# Altium PCB MainCyclomotion.PcbDoc
Units mm, origin at the board's own origin, x right, y up, seen from the top; angles counter-clockwise.
Board outline 88.21 x 73.53 mm, 4 copper layers (Top Layer, Int1 (GND), Int2 (PWR), Bottom Layer), stack 1.369 mm thick; 68 components, 37 nets, 242 pads, 41 vias.
Unrouted connection lines stored in the file: 5.
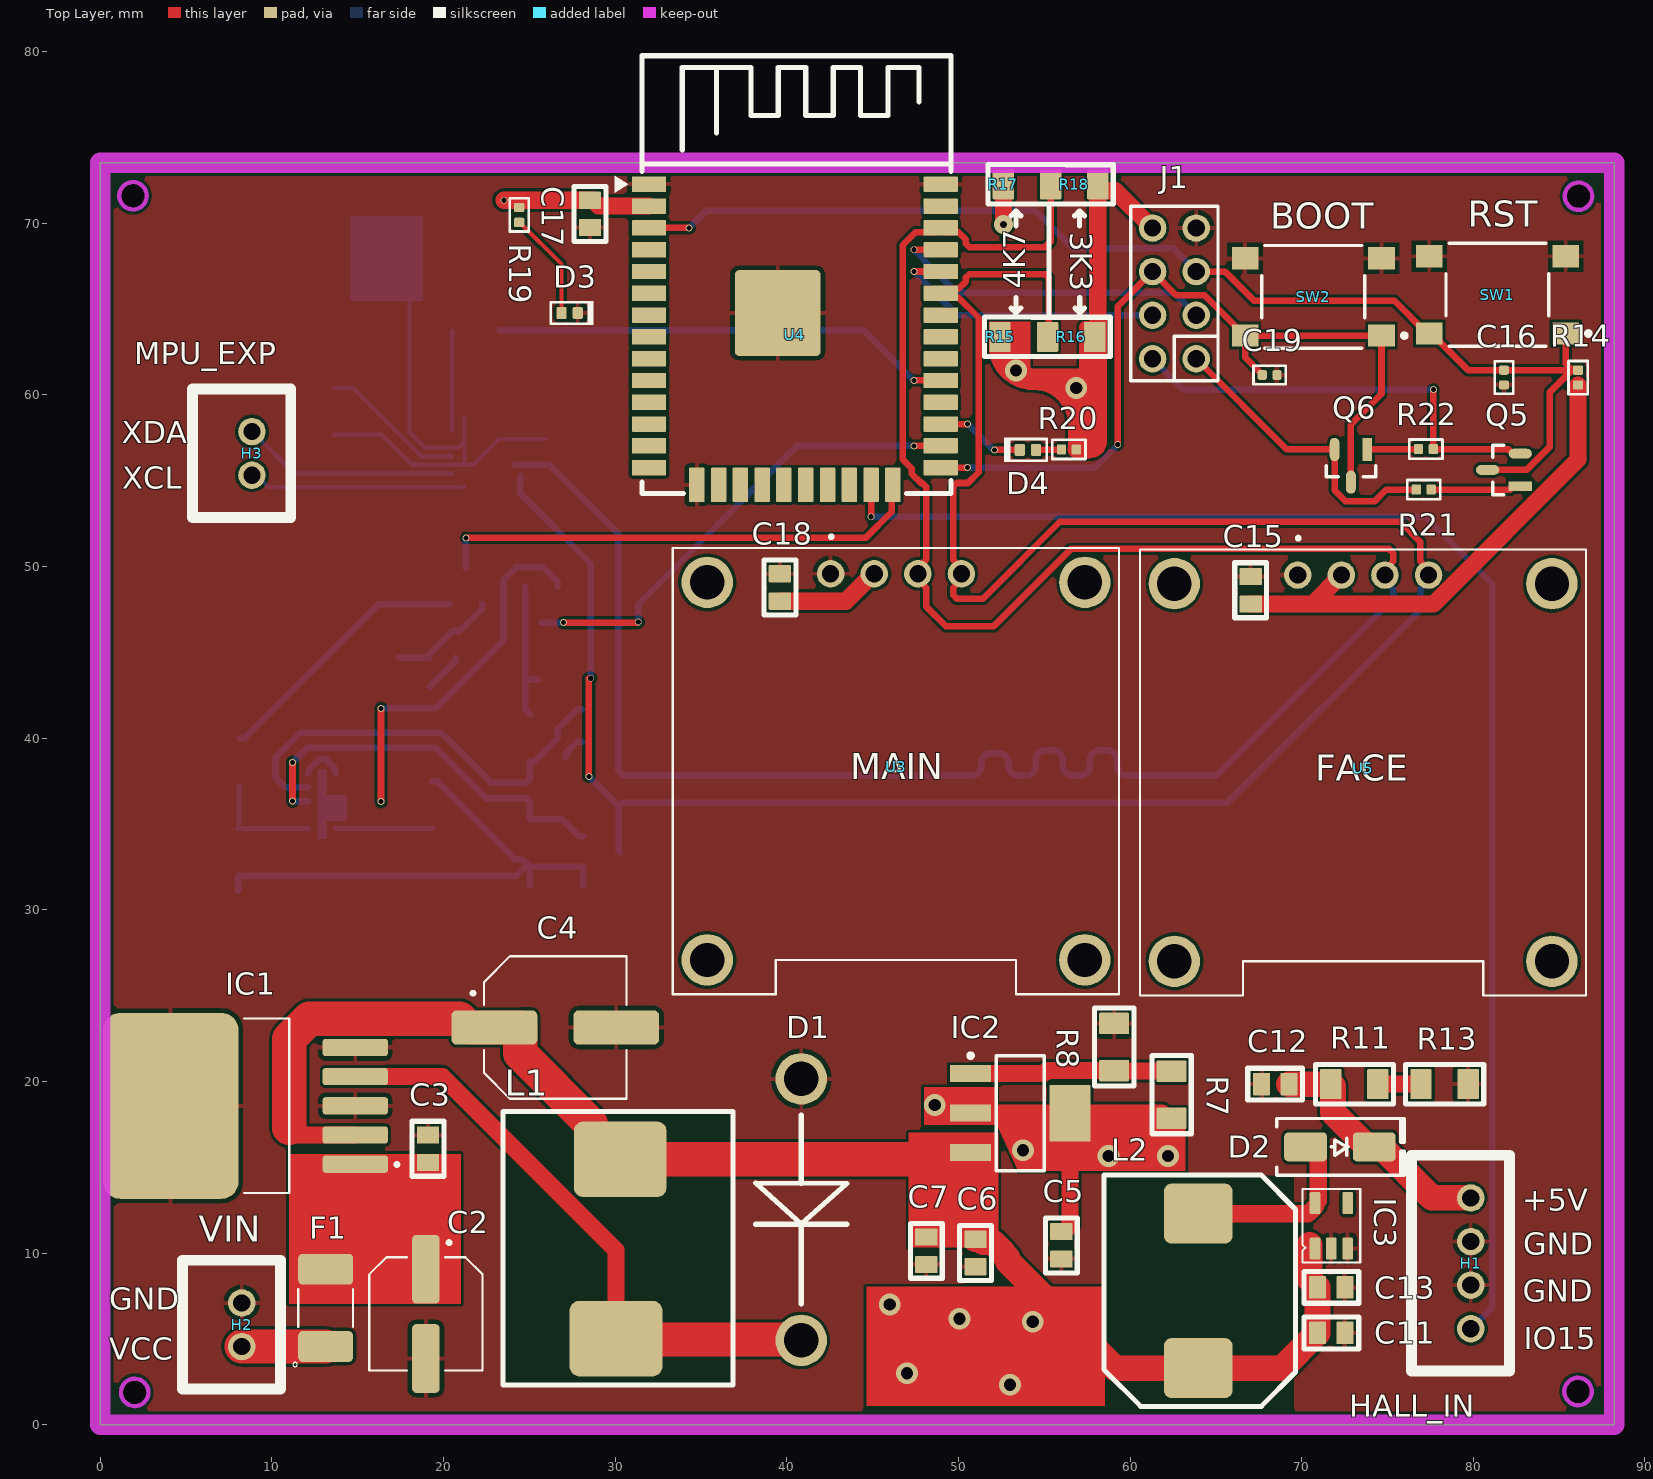
[diagram p0: Top Layer view]
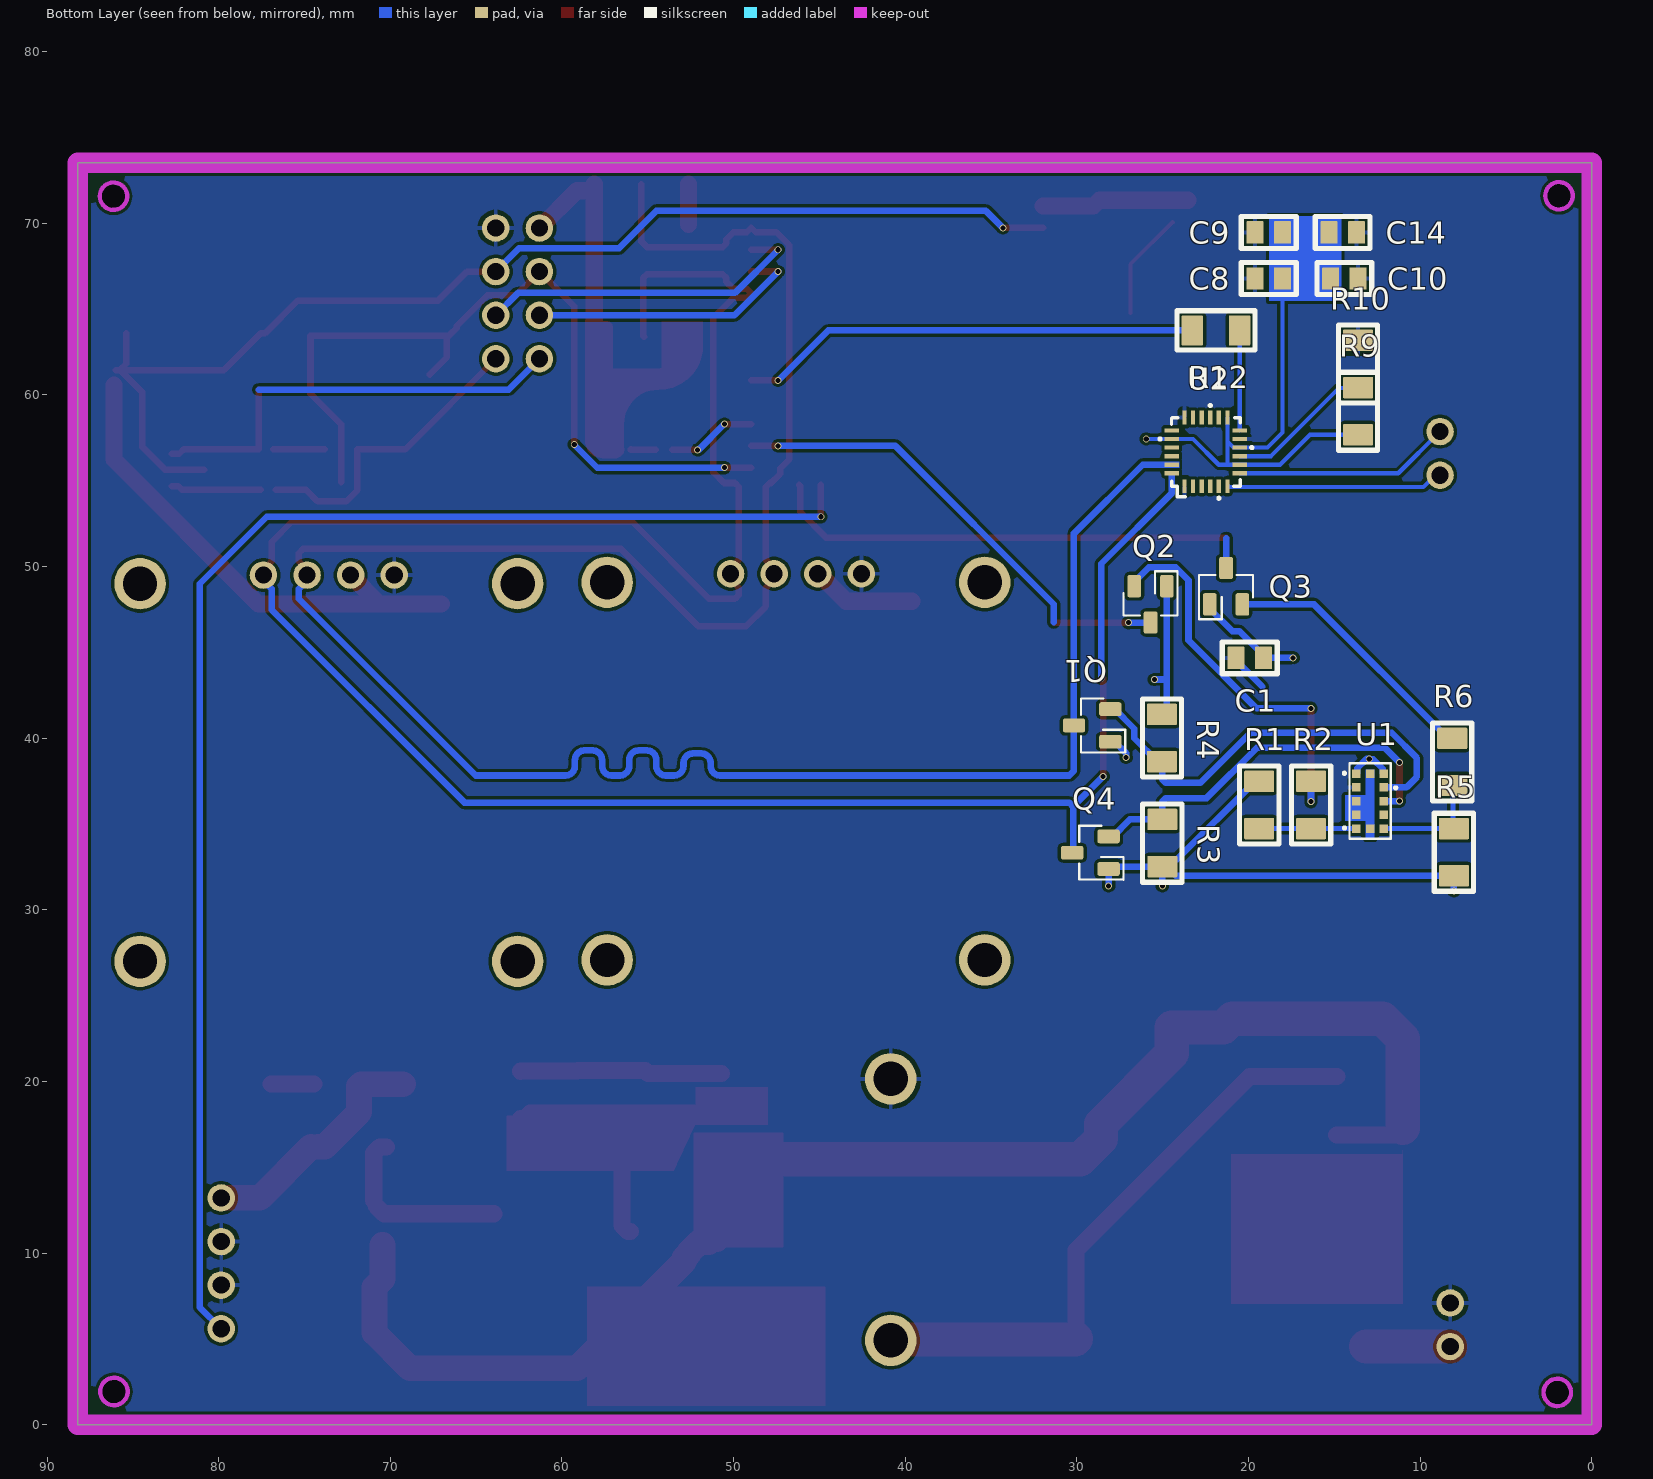
[diagram p1: Bottom Layer view, seen from below]
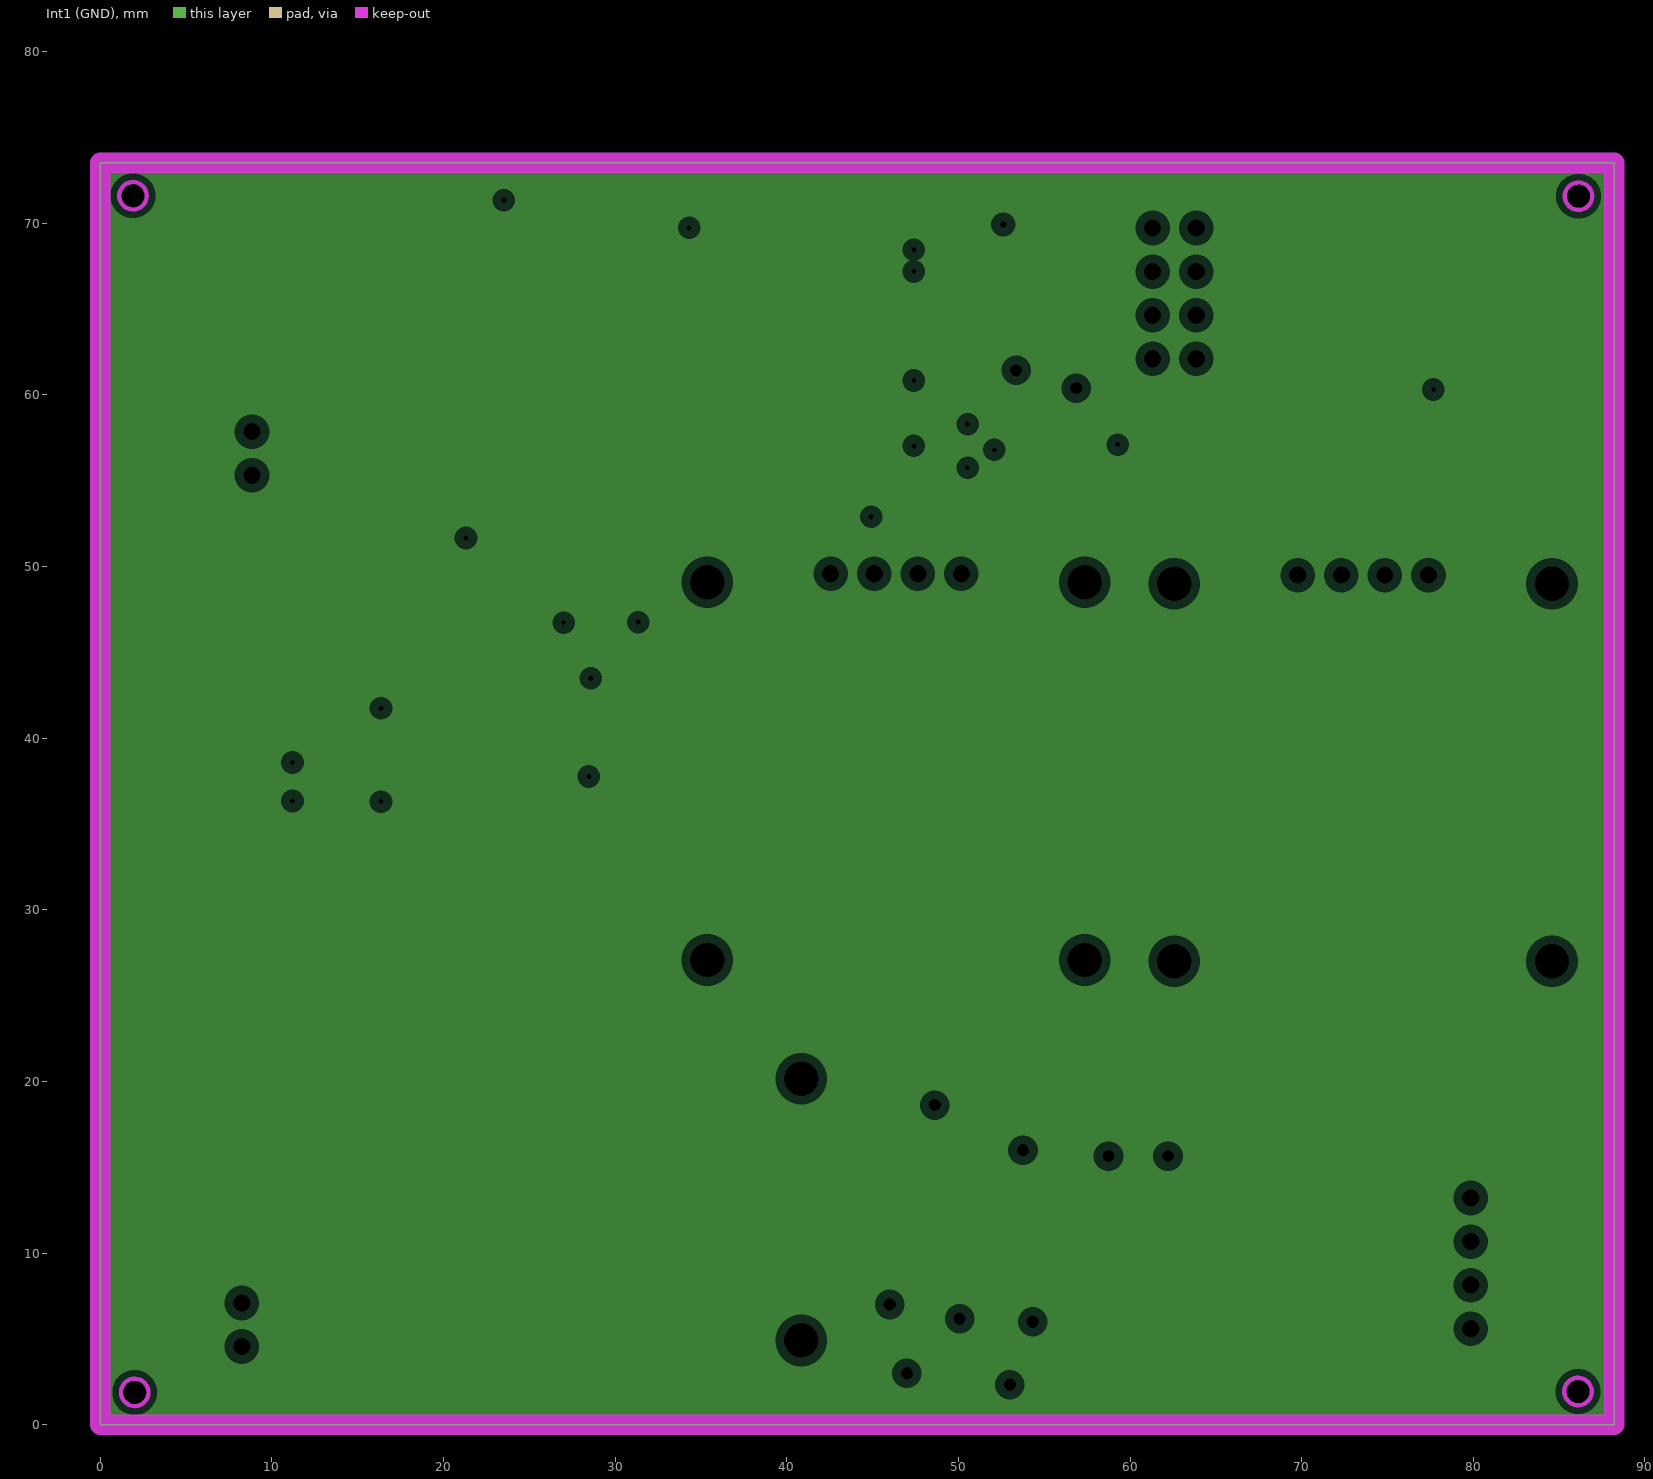
[diagram p2: Int1 (GND), clearances drawn from the general rule]
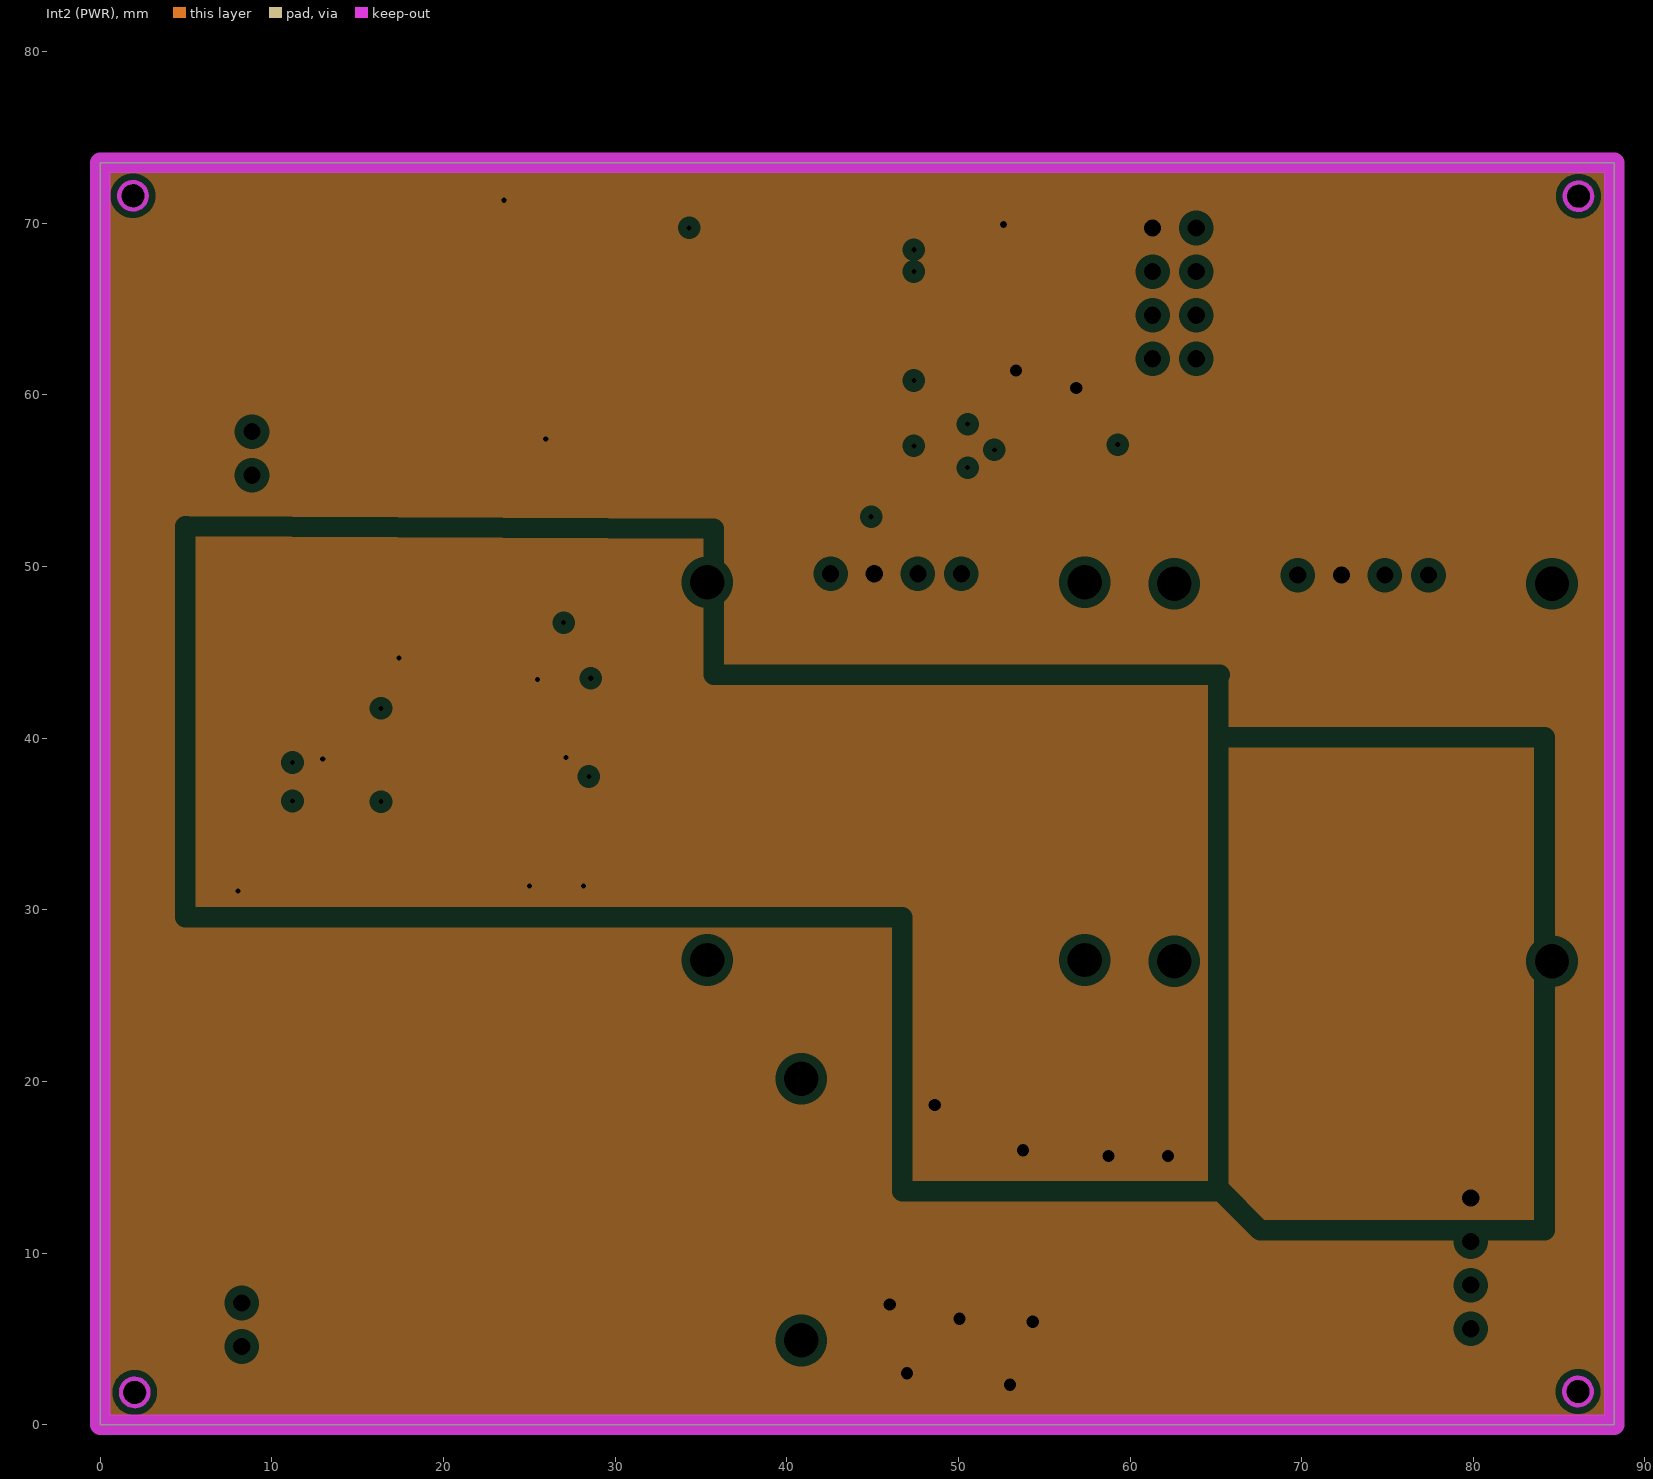
[diagram p3: Int2 (PWR), clearances drawn from the general rule]
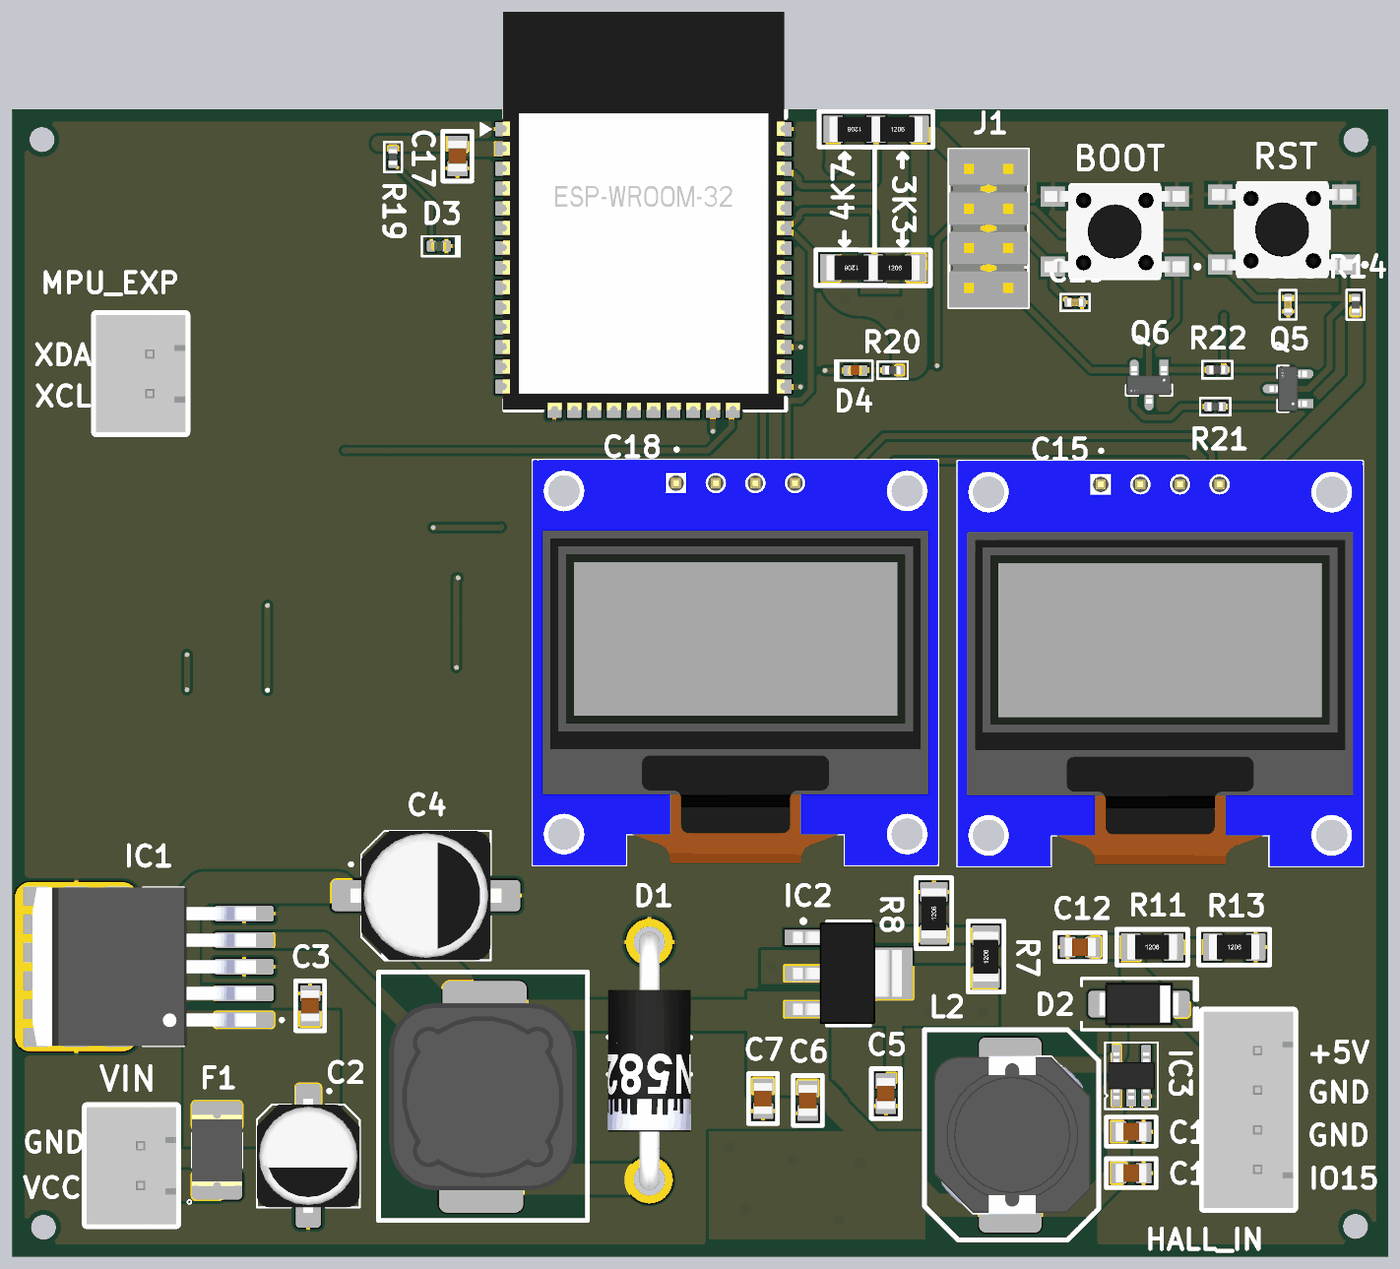
[diagram p4: 3D render of the assembled board from above, using the file's embedded part models]
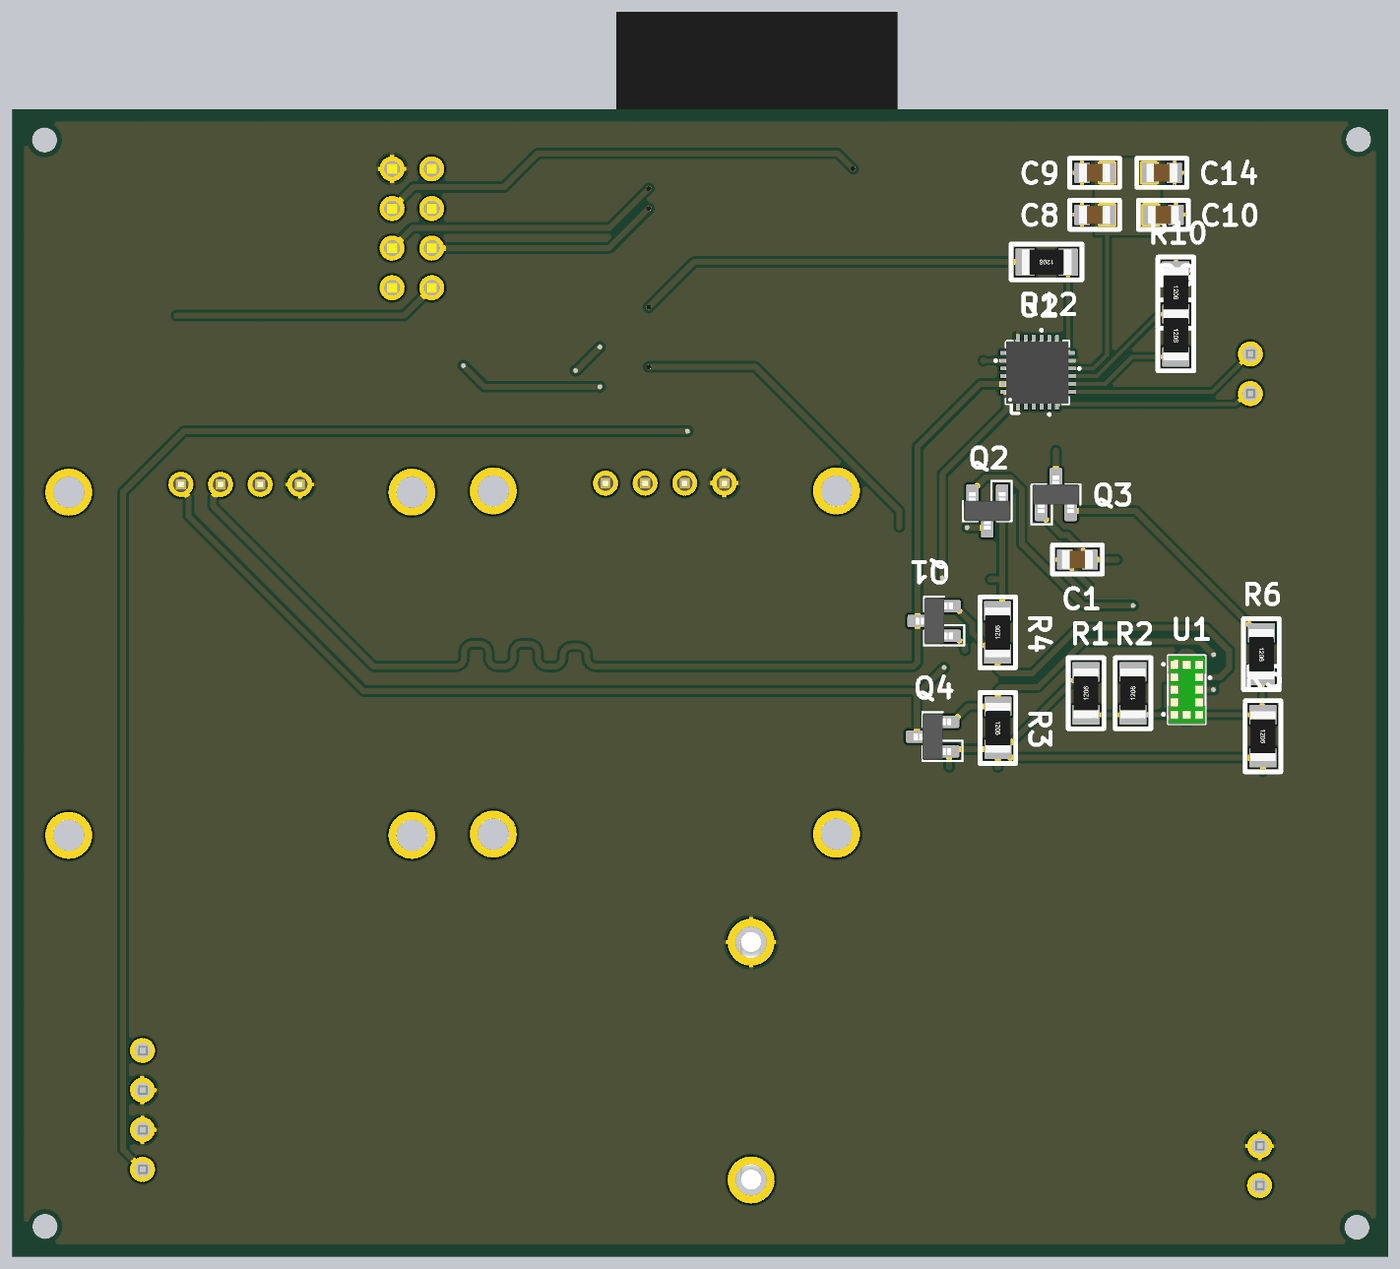
[diagram p5: 3D render of the assembled board from below, using the file's embedded part models]

## Layer stack, top to bottom
Top Solder: solder mask 0.0254, SM-001, Dk 4
Top Layer: signal copper 0.035
Dielectric 1: prepreg 0.1295, PP-017, Dk 4.3
Dielectric 2: prepreg 0.1295, PP-017, Dk 4.3
Int1 (GND): plane copper 0.035
Dielectric 3: core 0.7112, Core-039, Dk 4.8
Int2 (PWR): plane copper 0.035, net (Multiple Nets)
Dielectric 4: prepreg 0.1295, PP-017, Dk 4.3
Dielectric 5: prepreg 0.1295, PP-017, Dk 4.3
Bottom Layer: signal copper 0.035
Bottom Solder: solder mask 0.0254, SM-001, Dk 4

## Board outline
0,0 0,73.533 88.205,73.533 88.205,0
cut-out: 85.331,71.577 ccw(c86.131,71.577) 86.131,70.777 ccw(c86.131,71.577) 86.931,71.577 ccw(c86.131,71.577) 86.131,72.377 ccw(c86.131,71.577)
cut-out: 85.306,1.93 ccw(c86.106,1.93) 86.106,1.13 ccw(c86.106,1.93) 86.906,1.93 ccw(c86.106,1.93) 86.106,2.73 ccw(c86.106,1.93)
cut-out: 1.105,71.603 ccw(c1.905,71.603) 1.905,70.803 ccw(c1.905,71.603) 2.705,71.603 ccw(c1.905,71.603) 1.905,72.403 ccw(c1.905,71.603)
cut-out: 1.207,1.88 ccw(c2.007,1.88) 2.007,1.08 ccw(c2.007,1.88) 2.807,1.88 ccw(c2.007,1.88) 2.007,2.68 ccw(c2.007,1.88)

## Design rules (kind name [scope] priority, off if disabled: settings)
Clearance [All] p1: gap=0.178 ignorepadtopadclearanceinfootprint=FALSE
DiffPairsRouting [All] p1: maxlimit=1.2 minlimit=1.2 mostfreqgap=1.2 toplayer_minwidth=0.381 toplayer_maxwidth=0.381 toplayer_prefwidth=0.381 bottomlayer_minwidth=0.381 bottomlayer_maxwidth=0.381 bottomlayer_prefwidth=0.381 maxuncoupledlength=12.7
PlaneClearance [All] p1: clearance=0.508
PlaneConnect [All] p1: planeconnectstyle=Relief reliefexpansion=0.508 reliefentries=4 reliefconductorwidth=0.254 reliefairgap=0.254
PolygonConnect [All] p1: connectstyle=Relief reliefconductorwidth=0.254 reliefentries=4 polygonreliefangle="90 Angle" airgapwidth=0.254
RoutingVias [All] p1: holewidth=0.3 width=0.7 viastyle="Through Hole" minholewidth=0.3 minwidth=0.4 maxholewidth=0.4 maxwidth=1.1
SolderMaskExpansion [All] p1: expansion=0.102 istentingtop=FALSE
SupplyNets "Schematic Supply Nets_2" [InNet('+2V8')] p1: voltage=0.000
SupplyNets "Schematic Supply Nets_4" [InNet('+5V')] p2: voltage=0.000
SupplyNets "Schematic Supply Nets_3" [InNet('VCC')] p3: voltage=0.000
SupplyNets "Schematic Supply Nets_1" [InNet('+3V3')] p4: voltage=0.000
SupplyNets "Schematic Supply Nets" [InNet('GND')] p5: voltage=0.000
Width [All] p1: maxlimit=2 minlimit=0.25 preferedwidth=1
27 further rules are at their usual default settings.

## Components (designator, comment, footprint, x,y, rotation, side; value= is the part's Value field where it differs from the comment)
C1 "0.1uF, 50V" CAP_CERA_C2012(CC0805INCH) 19.926,44.679 r0 bottom value="100pF, 2012"
C2 "470uF/16V/ALU/20%" CAP_ALU_D_SMD 18.974,6.454 r270 top
C3 "0.1uF/50V/0805/10%" CAP_CERA_C2012(CC0805INCH) 19.101,16.077 r90 top value="100pF, 2012"
C4 "100uF/16V/ALU/20%" CAP_ALU_E_SMD 26.518,23.139 r0 top
C5 "22uF/50V/C0805/10%" CAP_CERA_C2012(CC0805INCH) 56,10.445 r90 top value="100pF, 2012"
C6 "10uF/50V/C0805/10%" CAP_CERA_C2012(CC0805INCH) 51,10 r90 top value="100pF, 2012"
C7 "0.1uF/50V/0805/10%" CAP_CERA_C2012(CC0805INCH) 48.13,10.127 r270 top value="100pF, 2012"
C8 "0.01uF, 50V" CAP_CERA_C2012(CC0805INCH) 18.821,66.777 r0 bottom value="100pF, 2012"
C9 "2.2nF, 50V" CAP_CERA_C2012(CC0805INCH) 18.821,69.469 r0 bottom value="100pF, 2012"
C10 "0.1uF, 50V" CAP_CERA_C2012(CC0805INCH) 14.414,66.777 r180 bottom value="100pF, 2012"
C11 "22uF/50V/C0805/10%" CAP_CERA_C2012(CC0805INCH) 71.729,5.346 r180 top value="100pF, 2012"
C12 "22uF/50V/C0805/10%" CAP_CERA_C2012(CC0805INCH) 68.458,19.839 r0 top value="100pF, 2012"
C13 "0.1uF/50V/0805/10%" CAP_CERA_C2012(CC0805INCH) 71.729,8 r0 top value="100pF, 2012"
C14 "0.1uF, 50V" CAP_CERA_C2012(CC0805INCH) 14.511,69.469 r180 bottom value="100pF, 2012"
C15 "0.1uF, 50V" CAP_CERA_C2012(CC0805INCH) 67.031,48.616 r90 top value="100pF, 2012"
C16 "1uF, 35V" CAPC1005X55N 81.788,61.013 r90 top value=1uF
C17 "0.1uF, 50V" CAP_CERA_C2012(CC0805INCH) 28.533,70.545 r270 top value="100pF, 2012"
C18 "0.1uF, 50V" CAP_CERA_C2012(CC0805INCH) 39.599,48.781 r90 top value="100pF, 2012"
C19 "100nF, 50V" CAPC1005X55N 68.134,61.163 r180 top
D1 "1N5822" D_1N5822_DO201AD_THT 40.843,20.15 r270 top
D2 "D Schottky" "DIODE SMA" 72.231,16.186 r0 top
D3 "GREEN" LED0402G 27.348,64.77 r180 top
D4 "RED" LED0402R 54.051,56.794 r0 top
F1 "MF-MSMF050-2" FUSM4632X85 13.132,6.804 r90 top
H1 "HALL_IN" XH2.54M-4 79.858,5.588 r90 top
H2 "VIN" XH2.54M-2 8.248,4.55 r90 top
H3 "MPU_EXP" XH2.54M-2 8.839,55.321 r90 top
IC1 "LM2596S-3.3" TO170P1524X483-6N 8.484,18.577 r90 top
IC2 "AMS1117-ADJ" SOT223 53.612,18.152 r270 top value="AMS1117-3.3V SOT223"
IC3 "MT3608" SOT23-5 71.731,11.586 r0 top
J1 "TSW-104-07-F-D" SAMTEC_TSW-104-07-F-D 62.586,65.913 r90 top
L1 "Inductor" L_CDRH17_33UH_SMD 30.175,10.236 r90 top value=33uH
L2 "Inductor" L_CDRH104_22UH_SMD 64.101,7.792 r90 top value=22uH
Q1 "BSS138" SOT95P240X111-3N 29.108,40.742 r0 bottom
Q2 "BSS138" SOT95P240X111-3N 25.705,47.794 r270 bottom
Q3 "BSS138" SOT95P240X111-3N 21.306,48.854 r90 bottom
Q4 "BSS138" SOT95P240X111-3N 29.21,33.325 r0 bottom
Q5 "SS8050-G" FP-SS8050-G-IPC_B 81.788,55.626 r180 top
Q6 "SS8050-G" FP-SS8050-G-IPC_B 72.873,55.869 r270 top
R1 "10K" "RES 1206 SMD"#1 19.377,36.105 r90 bottom
R2 "0R" "RES 1206 SMD"#1 16.358,36.105 r90 bottom
R3 "4.7K" "RES 1206 SMD"#1 25.019,33.887 r270 bottom
R4 "4.7K" "RES 1206 SMD"#1 25.044,40.008 r90 bottom
R5 "10K" "RES 1206 SMD"#1 8.028,33.355 r270 bottom
R6 "0R" "RES 1206 SMD"#1 8.128,38.616 r270 bottom
R7 "820R/R1206/1%" "RES 1206 SMD"#1 62.415,19.22 r90 top
R8 "1K/R1206/1%" "RES 1206 SMD"#1 59.078,22 r90 top
R9 "0R" "RES 1206 SMD"#1 13.614,59.052 r270 bottom
R10 "0R" "RES 1206 SMD"#1 13.614,61.802 r270 bottom
R11 "15K/R1206/1%" "RES 1206 SMD"#1 73.071,19.839 r0 top
R12 "0R" "RES 1206 SMD"#1 21.895,63.754 r0 bottom
R13 "2K/R1206/1%" "RES 1206 SMD"#1 78.329,19.839 r0 top
R14 "10K" RESC1005X37N 86.106,61.011 r270 top value=10kR
R15 "4.7K" "RES 1206 SMD"#2 53.801,63.38 r180 top
R16 "3.3K" "RES 1206 SMD"#1 56.569,63.38 r0 top
R17 "4.7K" "RES 1206 SMD"#2 53.997,72.27 r180 top
R18 "3.3K" "RES 1206 SMD"#1 56.747,72.27 r0 top
R19 "1K" RESC1005X37N 24.409,70.485 r90 top value=1kR
R20 "1K" RESC1005X37N 56.439,56.82 r0 top value=1kR
R21 "10K" RESC1005X37N 77.114,54.483 r0 top value=10kR
R22 "10K" RESC1005X37N 77.241,56.845 r180 top value=10kR
SW1 "RST" FP-PTS645SH50SMTR92LFS-MFG 81.41,65.829 r180 top
SW2 "BOOT" FP-PTS645SH50SMTR92LFS-MFG 70.679,65.706 r180 top
U1 "VL53L0X" SENSOR_VL53L0X 12.916,36.33 r270 bottom
U2 "MPU6050" "14# MPU -6050" 22.485,56.681 r180 bottom
U3 "MAIN" MODULE_DM-OLED096-636 46.368,38.078 r0 top
U4 "ESP-WROOM-32" "ESP32 WROOM" 31.972,72.27 r0 top
U5 "FACE" MODULE_DM-OLED096-636 73.584,37.998 r0 top

## Footprints (in the part's own frame and the unit in brackets; to place one, negate y for a bottom-side part, rotate by r counter-clockwise, add the part's x,y. Pads: shape width x height; smd on the part's side, far side on the other; paste and mask are expansions set on the pad)
"14# MPU -6050" [mm] "QFN"
  rrect10% 0.25x0.8 smd mask+0.05: 1(-1.243,-2) 2(-0.743,-2) 3(-0.243,-2) 4(0.257,-2) 5(0.757,-2) 6(1.257,-2) 13(1.257,2) 14(0.757,2) 15(0.257,2) 16(-0.243,2) 17(-0.743,2) 18(-1.243,2)
  rrect10% 0.85x0.25 smd mask+0.05: 7(1.975,-1.25) 8(1.975,-0.75) 9(1.975,-0.25) 10(1.975,0.25) 11(1.975,0.75) 12(1.975,1.25) 19(-1.975,1.25) 20(-1.975,0.75) 21(-1.975,0.25) 22(-1.975,-0.25) 23(-1.975,-0.75) 24(-1.975,-1.25)
  silkscreen extent -2.73,-2.75 2.72,2.75, body extent -2.03,-2.02 2.01,2.02, height 0.85
CAP_ALU_D_SMD [mm]
  rrect30% 4x1.6 smd: 1(-2.6,0) 2(2.6,0)
  silkscreen extent -4.25,-3.3 3.3,3.3, body extent -3.65,-3.3 3.65,3.3, height 5.8
CAP_ALU_E_SMD [mm]
  rrect30% 5x2 smd: 1(-3.55,0) 2(3.55,0)
  silkscreen extent -4.9,-4.15 4.15,4.15, body extent -4.85,-4.15 4.85,4.15, height 10.2
CAP_CERA_C2012(CC0805INCH) [mm] "Chip Capacitor, 2-Leads, Body 2.0x1.3mm, IPC Medium Density"
  rrect10% 1x1.3 smd: 1(-0.8,0) 2(0.8,0)
  silkscreen extent -1.6,-0.93 1.6,0.93, body extent -1,-0.6 1,0.6, height 0.95
CAPC1005X55N [mm]
  rrect53% 0.54x0.6 smd: 1(-0.43,0) 2(0.43,0)
  silkscreen extent -0.94,-0.53 0.94,0.53, body extent -0.5,-0.25 0.5,0.25, height 0.55
D_1N5822_DO201AD_THT [mm] "Schottky Diode 1N5822, 3A 40V, DO-201AD package"
  round 3 hole 2 mask+0.1: 1(0,0) 2(15.24,0)
  silkscreen extent 2.12,-2.65 13.12,2.65, body extent -0.67,-2.66 15.87,2.66, height 5.36
"DIODE SMA" [mm] "SMA"
  rrect30% 2.5x1.7 smd: 1(-2,0) 2(2,0)
  silkscreen extent -3.68,-1.65 3.75,1.65, body extent -2.6,-1.37 2.6,1.37, height 2.4
"ESP32 WROOM" [mm] "ESP32 WROOM"
  rrect10% 2x0.9 smd: 1(0,0) 2(0,-1.27) 3(0,-2.54) 4(0,-3.81) 5(0,-5.08) 6(0,-6.35) 7(0,-7.62) 8(0,-8.89) 9(0,-10.16) 10(0,-11.43) 11(0,-12.7) 12(0,-13.97) 13(0,-15.24) 14(0,-16.51) 25(17,-16.51) 26(17,-15.24) 27(17,-13.97) 28(17,-12.7) 29(17,-11.43) 30(17,-10.16) 31(17,-8.89) 32(17,-7.62) 33(17,-6.35) 34(17,-5.08) 35(17,-3.81) 36(17,-2.54) 37(17,-1.27) 38(17,0)
  rrect10% 0.9x2 smd: 15(2.785,-17.51) 16(4.055,-17.51) 17(5.325,-17.51) 18(6.595,-17.51) 19(7.865,-17.51) 20(9.135,-17.51) 21(10.405,-17.51) 22(11.675,-17.51) 23(12.945,-17.51) 24(14.215,-17.51)
  rrect10% 5x5 smd: 39(7.5,-7.5)
  silkscreen extent -2,-18.02 17.6,7.49, body extent -0.54,-18.02 17.54,7.52, height 3
FP-PTS645SH50SMTR92LFS-MFG [mm]
  rect 1.55x1.3 smd paste+0 mask+0: 1(-3.975,2.25) 2(3.975,2.25) 3(-3.975,-2.25) 4(3.975,-2.25)
  silkscreen extent -5.43,-3 3,3, body extent -4.5,-3 4.5,3, height 4.3
FP-SS8050-G-IPC_B [mm]
  rect 1.357x0.572 smd paste+0 mask+0: 1(-0.951,0.95)
  rrect100% 1.357x0.572 smd paste+0 mask+0: 2(-0.951,-0.95) 3(0.951,0)
  silkscreen extent 0,-1.45 0.65,1.45, body extent -1.88,-1.7 1.88,1.7, height 0.25
FUSM4632X85 [mm]
  rrect30% 1.8x3.2 smd: 1(-2.25,0) 2(2.25,0)
  silkscreen extent -3.43,-1.6 1.1,1.9, body extent -2.27,-1.62 2.27,1.62, height 1.1
L_CDRH17_33UH_SMD [mm] "Shielded Power Inductor CDRH17, 33µH ±20%, 1.2A, 120mΩ DCR, SMD, 12x12x5mm"
  rrect25% 4.4x5.4 smd mask+0.1: 1(-5.225,0.125) 2(5.225,-0.119)
  silkscreen extent -7.93,-6.7 8,6.7, body extent -6,-6 6,6, height 8
L_CDRH104_22UH_SMD [mm] "Shielded Power Inductor CDRH104, 22µH ±20%, 3.6A, SMD, 10X10mm"
  rrect25% 3.5x4 smd mask+0.1: 1(-4.5,0.125) 2(4.5,0.125)
  silkscreen extent -6.73,-5.55 6.75,5.63, body extent -5.1,-5 5.1,5, height 4
LED0402G [mm]
  rrect30% 0.6x0.7 smd: 1(-0.475,0) 2(0.475,0)
  silkscreen extent -1.4,-0.71 1.09,0.71, body extent -0.5,-0.3 0.5,0.3, height 0.21
LED0402R [mm]
  rrect30% 0.6x0.7 smd: 1(-0.475,0) 2(0.475,0)
  silkscreen extent -1.4,-0.71 1.09,0.71, body extent -0.5,-0.3 0.5,0.3, height 0.21
MODULE_DM-OLED096-636 [mm]
  round 1.6 hole 1: 1(-3.81,11.5) 2(-1.27,11.5) 3(1.27,11.5) 4(3.81,11.5)
  round 3 hole 2: S1(-11,11) S2(11,11) S3(11,-11) S4(-11,-11)
  silkscreen extent -13.01,-13 12.99,13.75, body extent -13,-13 13,13, height 5.66
"RES 1206 SMD"#1 [mm]
  rrect10% 1.25x1.75 smd mask+0.1: 1(-1.375,0) 2(1.375,0)
  silkscreen extent -2.27,-1.15 2.28,1.14, body extent -1.6,-0.8 1.6,0.8, height 0.65
"RES 1206 SMD"#2 [mm]
  rrect10% 1.25x1.75 smd mask+0.1: 2(1.375,0)
  silkscreen extent -2.27,-1.15 2.28,1.14, body extent -1.6,-0.8 1.6,0.8, height 0.65
RESC1005X37N [mm]
  rrect30% 0.54x0.6 smd: 1(-0.432,0) 2(0.432,0)
  silkscreen extent -0.97,-0.56 0.97,0.56, body extent -0.5,-0.25 0.5,0.25, height 0.37
SAMTEC_TSW-104-07-F-D [mm]
  round 1.6 hole 1: 1(-3.81,-1.27) 2(-3.81,1.27) 3(-1.27,-1.27) 4(-1.27,1.27) 5(1.27,-1.27) 6(1.27,1.27) 7(3.81,-1.27) 8(3.81,1.27)
  silkscreen extent -5.08,-2.54 5.08,2.54, body extent -5.08,-2.54 5.08,2.54, height 8.38
SENSOR_VL53L0X [mm]
  rect 0.5x0.5 smd: 1(-1.6,-0.8) 2(-0.8,-0.8) 3(0,-0.8) 4(0.8,-0.8) 5(1.6,-0.8) 6(1.6,0) 7(1.6,0.8) 8(0.8,0.8) 9(0,0.8) 10(-0.8,0.8) 11(-1.6,0.8) 12(-1.6,0)
  silkscreen extent -2.2,-1.57 2.2,1.57, body extent -2.2,-1.2 2.2,1.2, height 0.68
SOT23-5 [mm] "CASE: SOT"
  rrect30% 0.62x1.3 smd mask+0.076: 1(-0.953,-1.325) 2(-0.003,-1.325) 3(0.947,-1.325) 4(0.952,1.325) 5(-0.952,1.325)
  silkscreen extent -1.69,-2.14 1.69,2.14, body extent -1.5,-1.5 1.5,1.5, height 1.41
SOT95P240X111-3N [mm]
  rrect30% 1.3x0.8 smd: 1(-1.06,0.95) 2(-1.06,-0.95) 3(1.06,0)
  silkscreen extent -1.92,-1.57 0.65,1.58, body extent -1.2,-1.45 1.2,1.45, height 1.11
SOT223 [mm]
  rect 1x2.4 smd: 1(-2.3,-2.9) 2(0,-2.9) 3(2.3,-2.9)
  rect 3.3x2.4 smd: 4(0,2.9)
  silkscreen extent -3.47,-3.02 3.35,1.4, body extent -3.25,-3.56 3.25,3.4, height 1.68
TO170P1524X483-6N [mm]
  rrect30% 1x3.8 smd: 1(-3.4,-6.375) 2(-1.7,-6.375) 3(0,-6.375) 4(1.7,-6.375) 5(3.4,-6.375)
  rrect25% 10.84x7.88 smd paste-6: 6(0,4.375)
  silkscreen extent -5.08,-8.9 5.08,0.12, body extent -5.08,-7.15 5.08,7.2, height 4.65
XH2.54M-2 [mm]
  round 1.6 hole 1: 1(0,0) 2(2.54,0)
  silkscreen extent -2.47,-2.26 5.03,3.46, body extent -2.48,-2.26 5.02,3.48, height 6.91
XH2.54M-4 [mm]
  round 1.6 hole 1: 1(0,0) 2(2.54,0) 3(5.08,0) 4(7.62,0)
  silkscreen extent -2.47,-2.25 10.11,3.47, body extent -2.48,-2.26 10.1,3.48, height 6.91

## Part data
C1 C3 C5 C6 C7 C8 C9 C10 C11 C12 C13 C14 C15 C17 C18: library part "CAP CERA 0805", "CERAMIC CAP 0805"
C2: library part Cap_ALU_D_SMD
C4: library part Cap_ALU_E_SMD
C16: library part CL05A105KL5NRNC, "CAP CER 1UF 35V X5R 0402", Capacitor Type=Ceramic, Case/Package=0402, LCSC Part Number=C307413, Manufacturer=Samsung, Max Operating Temperature=85°C, Min Operating Temperature=-55°C, Package Shape=Rectangular, Rated DC Voltage (URdc)=35V, Supplier Part Number=1276-6796-1-ND, Temperature Characteristics Code=X5R, Tolerance  (fill in as +-)=10%, Category="Ceramic Capacitors", ComponentLink1Description=https://datasheet.ciiva.com:443/pdfs/VipMasterIC/IC/SEMS/SEMS-S-A0008384515/SEMS-S-A0008872905-1.pdf?src-supplier=IHS+Markit, ComponentLink1URL=https://datasheet.ciiva.com:443/pdfs/VipMasterIC/IC/SEMS/SEMS-S-A0008384515/SEMS-S-A0008872905-1.pdf?src-supplier=IHS+Markit, ComponentLink2Description=http://www.samsungsem.com/kr/support/product-search/mlcc/CL05A105KL5NRNC.jsp?src-supplier=Digikey, ComponentLink2URL=http://www.samsungsem.com/kr/support/product-search/mlcc/CL05A105KL5NRNC.jsp?src-supplier=Digikey, Dielectric Material=Ceramic, JESD-609 Code=e3, Manufacturer Part Number=CL05A105KL5NRNC, Mounting Technology="Surface Mount", Multilayer=Yes, Packaging="Tape and Reel", Pins=2, Pricing="1=0.33, 10=0.212, 50=0.149, 100=0.1202, 500=0.08934, 1000=0.07818, 2500=0.07446, 5000=0.06887 (USD)", Reach SVHC Compliant=Yes, RoHS=Yes, RoHS Compliant=Yes, Stock=469958, Supplier=Digikey, Terminal Finish=Nickel, Termination=Wraparound, Tolerance (fill in as +-)=10%
C19: library part CL05B104KB54PNC, "CAP CER 0.1UF 50V X7R 0402", Capacitor Type=Ceramic, LCSC Part Number=C307331, Manufacturer=Samsung, Supplier Part Number=1276-CL05B104KB54PNCCT-ND, Category="Ceramic Capacitors", ComponentLink1Description=https://datasheet.ciiva.com:443/pdfs/VipMasterIC/IC/SEMS/SEMS-S-A0006318249/SEMS-S-A0006320959-1.pdf?src-supplier=IHS+Markit, ComponentLink1URL=https://datasheet.ciiva.com:443/pdfs/VipMasterIC/IC/SEMS/SEMS-S-A0006318249/SEMS-S-A0006320959-1.pdf?src-supplier=IHS+Markit, ComponentLink2Description=https://datasheet.octopart.com/CL05B104KB54PNC-Samsung-datasheet-8326407.pdf?src-supplier=TME, ComponentLink2URL=https://datasheet.octopart.com/CL05B104KB54PNC-Samsung-datasheet-8326407.pdf?src-supplier=TME, Dielectric Material=Ceramic, Manufacturer Part Number=CL05B104KB54PNC, Pins=2, Pricing="1=0.1, 10=0.044, 50=0.025, 100=0.0194, 500=0.0146, 1000=0.01147, 2500=0.01043, 5000=0.00959 (USD)", Reach SVHC Compliant=Yes, RoHS=Yes, RoHS Compliant=Yes, Stock=1237875, Supplier=Digikey
D1: "Schottky Diode 3A 40V DO-201AD", ComponentLink1Description=Datasheet, ComponentLink1URL="D:\Dropbox\Datasheets\Diodes and Rectifiers\Diodes\1N582X.pdf", Unit Price=0.1667
D2: "Schottky Diode", Code_JEDEC=DO-214-AA, LatestRevisionDate=17-Jul-2002, LatestRevisionNote="Re-released for DXP Platform.", PackageDescription="DO-214-AA/SMB; 2 C-Bend Leads; Body 5.3 x 3.6 mm, inc. leads (LxW)", PackageReference=SMB, Published=8-Jun-2000, Publisher="Altium Limited"
D3: library part VLMG1500-GS08, "LED YLW-GRN 0402 SMD", Case Code (Imperial)=0402, Case Code (Metric)=1005, Color=Green,Yellow, Forward Current=30mA, Forward Voltage=2V, Illumination Color=Green, LCSC Part Number=C511404, Lens Color=Clear, Manufacturer=Vishay, Max Operating Temperature=85°C, Min Operating Temperature=-30°C, Package Quantity=1, Power Dissipation=75mW, Reverse Voltage=5V, Supplier Part Number=VLMG1500-GS08CT-ND, Test Current=20mA, Case/Package=0402, Category=LEDs, ComponentLink1Description=https://datasheet.ciiva.com/12071/vlmo1500-244705-12071911.pdf?src-supplier=Mouser, ComponentLink1URL=https://datasheet.ciiva.com/12071/vlmo1500-244705-12071911.pdf?src-supplier=Mouser, ComponentLink2Description=https://datasheet.ciiva.com/30005/vlmo1500-30005134.pdf?src-supplier=Avnet, ComponentLink2URL=https://datasheet.ciiva.com/30005/vlmo1500-30005134.pdf?src-supplier=Avnet, Depth=0.5mm, Dominant Wavelength=571nm, Height=0.35mm, Lead Free="Lead Free", Length=1mm, Lens Style=Rectangular, Luminous Intensity=35mcd, Manufacturer Part Number=VLMG1500-GS08, Mounting Technology="Surface Mount", Number of Elements=1, Number of LEDs=1, Packaging="Tape and Reel", Pins=2, Power Rating=75mW, Pricing="1=0.34, 10=0.265, 100=0.119, 500=0.10746, 1000=0.08827 (USD)", Radiation Hardening=No, Reach SVHC Compliant=Unknown, RoHS=Yes, RoHS Compliant=Yes, Series=CHipLED, Stock=98, Supplier=Digikey, Viewing Angle=130°, Wavelength=571nm, Width=0.5mm
D4: library part VLMS1500-GS08, "LED RED 0402 SMD", Color=Red, Forward Current=30mA, Forward Voltage=2.4V, LCSC Part Number=C511370, Manufacturer=Vishay, Max Operating Temperature=85°C, Min Operating Temperature=-30°C, Reverse Voltage-Max=5V, Supplier Part Number=VLMS1500-GS08CT-ND, Category=LEDs, Channels=1, Color@wavelength=Red, ComponentLink1Description=https://datasheet.ciiva.com:443/pdfs/VipMasterIC/IC/VISH/VISH-S-A0003457490/VISH-S-A0003457490-1.pdf?src-supplier=IHS+Markit, ComponentLink1URL=https://datasheet.ciiva.com:443/pdfs/VipMasterIC/IC/VISH/VISH-S-A0003457490/VISH-S-A0003457490-1.pdf?src-supplier=IHS+Markit, ComponentLink2Description=http://www.farnell.com/datasheets/1809983.pdf?src-supplier=Farnell, ComponentLink2URL=http://www.farnell.com/datasheets/1809983.pdf?src-supplier=Farnell, ComponentLink3Description=http://www.mouser.com/ds/2/427/vlmo1500-244705.pdf?src-supplier=Mouser, ComponentLink3URL=http://www.mouser.com/ds/2/427/vlmo1500-244705.pdf?src-supplier=Mouser, ComponentLink4Description=https://datasheet.octopart.com/VLMS1500-GS08-Vishay-datasheet-62332426.pdf?src-supplier=Newark, ComponentLink4URL=https://datasheet.octopart.com/VLMS1500-GS08-Vishay-datasheet-62332426.pdf?src-supplier=Newark, ComponentLink5Description=https://datasheet.octopart.com/VLMS1500-GS08-Vishay-datasheet-33014519.pdf?src-supplier=Element14, ComponentLink5URL=https://datasheet.octopart.com/VLMS1500-GS08-Vishay-datasheet-33014519.pdf?src-supplier=Element14, ComponentLink6Description=http://datasheet.octopart.com/VLMS1500-GS08-Vishay-datasheet-21227148.pdf?src-supplier=Avnet, ComponentLink6URL=http://datasheet.octopart.com/VLMS1500-GS08-Vishay-datasheet-21227148.pdf?src-supplier=Avnet, ComponentLink7Description=http://www.farnell.com/datasheets/1809983.pdf?src-supplier=Newark, ComponentLink7URL=http://www.farnell.com/datasheets/1809983.pdf?src-supplier=Newark, ComponentLink8Description=http://www.farnell.com/datasheets/2050839.pdf?src-supplier=Newark, ComponentLink8URL=http://www.farnell.com/datasheets/2050839.pdf?src-supplier=Newark, ComponentLink9Description=http://datasheet.octopart.com/VLMS1500-GS08-Vishay-datasheet-21227148.pdf?src-supplier=Quest, ComponentLink9URL=http://datasheet.octopart.com/VLMS1500-GS08-Vishay-datasheet-21227148.pdf?src-supplier=Quest, ComponentLink10Description=http://datasheet.octopart.com/VLMS1500-GS08-Vishay-datasheet-21227148.pdf?src-supplier=NAC+Semi, ComponentLink10URL=http://datasheet.octopart.com/VLMS1500-GS08-Vishay-datasheet-21227148.pdf?src-supplier=NAC+Semi, Luminous Intensity-Nom=54mcd, Manufacturer Part Number=VLMS1500-GS08, Mounting Technology="Surface Mount", Optoelectronic Device Type="SINGLE COLOR LED", Overall Height=0.35mm, Packaging="Tape and Reel", Pins=2, Pricing="1=0.34, 10=0.265, 100=0.119, 500=0.10746, 1000=0.08827 (USD)", Reach SVHC Compliant=Yes, RoHS=Yes, RoHS Compliant=Yes, Shape=Rectangular, Size=0.5mm, Stock=70376, Supplier=Digikey, Terminal Pitch=0.95mm, Viewing Angle=130°
F1: "Polymeric PTC Resettable Fuse 15V 500 mA Ih Surface Mount 1812 (4532 Metric), Concave", Package="1812 Bourns", Availability="In Stock", Check_prices=https://www.snapeda.com/parts/MF-MSMF050-2/Bourns+-+J.W.+Miller/view-part/?ref=eda, MF=Bourns, MP=MF-MSMF050-2, Price=None, Purchase-URL=https://pricing.snapeda.com/search/part/MF-MSMF050-2/?ref=eda, SnapEDA_Link=https://www.snapeda.com/parts/MF-MSMF050-2/Bourns+-+J.W.+Miller/view-part/?ref=snap
H1: library part "Header 4P 2.54 Duc Thang", "Cắm", Chung_Loai=Cắm, Don_Vi=Con, Ma_Hang=MH001285, Ten_Linh_Kien="Header 4P XH2.54-4P Đực Thẳng"
H2 H3: library part "Header 2P 2.54 Duc Thang", "Cắm", Chung_Loai=Cắm, Don_Vi=Con, Ma_Hang=MH001283, Ten_Linh_Kien="Header 2P XH2.54-2P Đực Thẳng"
IC1: "SIMPLE SWITCHER® 4.5V to 40V, 3A Low Component Count Step-Down Regulator"
IC2: library part "AMS1117 SMD", "Dán", Chung_Loai=Dán, Don_Vi=Con, Ma_Hang=MH000596
IC3: "The MT3608 is a constant frequency, 6-pin SOT23 / current mode step-up converter", Alternate Part Number-1=NA, Case/Package=SOT-23-5, Manufacturer=AEROSEMI, Manufacturer Part Number=MT3608, Supplier Part Number-1=NA, Supplier-1=NA
Q1 Q2 Q3 Q4: "N-Channel 50 V 220mA (Ta) 350mW (Ta) Surface Mount SOT-23-3"
Q5 Q6: "TRANS NPN 25V 1.5A SOT23-3", LCSC Part Number=C164886, Manufacturer=Comchip, Supplier Part Number=641-1790-1-ND, Category=Transistors, ComponentLink1Description=https://datasheet.ciiva.com:443/pdfs/VipMasterIC/IC/COMC/COMC-S-A0004994192/COMC-S-A0004994192-1.pdf?src-supplier=IHS+Markit, ComponentLink1URL=https://datasheet.ciiva.com:443/pdfs/VipMasterIC/IC/COMC/COMC-S-A0004994192/COMC-S-A0004994192-1.pdf?src-supplier=IHS+Markit, ComponentLink2Description="http://www.comchiptech.com/admin/files/product/SS8050-G RevA181526.pdf?src-supplier=Digikey", ComponentLink2URL="http://www.comchiptech.com/admin/files/product/SS8050-G RevA181526.pdf?src-supplier=Digikey", Manufacturer Part Number=SS8050-G, Pricing="1=0.29, 10=0.2, 100=0.0978, 500=0.08154, 1000=0.05666 (USD)", Reach SVHC Compliant=Yes, RoHS=Yes, RoHS Compliant=Yes, Stock=108568, Supplier=Digikey
R1 R2 R3 R4 R5 R6 R7 R8 R9 R10 R11 R12 R13 R15 R16 R17 R18: library part RES-1206, "RES SMD 10K OHM 1% 1206", Manufacturer=Yageo, Manufacturer Part Number=RC1206FR-075R1L, Operating Temperature="-55°C ~ 155°C", Package / Case="1206 (3216 Metric)", Power (Watts)="0.25W, 1/4W", Resistance (Ohms)=5.1, Supplier Device Package=1206, Supplier Part Number 1=311-5.10FRCT-ND, Temperature Coefficient=±200ppm/°C, Tolerance=±1%, Category=Resistors, ComponentLink1Description=http://www.yageo.com/documents/recent/PYu-RC_Group_51_RoHS_L_7.pdf, ComponentLink1URL=http://www.yageo.com/documents/recent/PYu-RC_Group_51_RoHS_L_7.pdf, Composition="Thick Film", Failure Rate=-, Features="Moisture Resistant", Height - Seated (Max)="0.026\" (0.65mm)", Packaging="Cut Tape (CT)", Part Status=Active, Pricing 1="1=0.1, 10=0.051, 100=0.0207, 1000=0.0093, 2500=0.00807 (USD)", RoHS="RoHS Compliant", Size / Dimension="0.122\" L x 0.063\" W (3.10mm x 1.60mm)", Stock 1=96701, Supplier 1=Digi-Key
R14 R21 R22: library part AC0402FR-0710KL, "RES SMD 10K OHM 1% 1/16W 0402", Case/Package=0402, LCSC Part Number=C144807, Manufacturer=Yageo, Max Operating Temperature=155°C, Min Operating Temperature=-55°C, Package Height=0.32mm, Package Length=1mm, Package Shape=Rectangular, Package Style=SMTMeter, Package Width=0.5mm, Power=62.5mW, Rated Temperature=70°C, Resistor Type="FIXED RESISTOR", Supplier Part Number=YAG3436CT-ND, Temperature Coefficient=100ppm/°C, Tolerance=1%, Working Voltage=50V, Additional Feature="LASER TRIMMABLE", Category="Chip SMD Resistors", ComponentLink1Description=https://datasheet.ciiva.com:443/pdfs/VipMasterIC/IC/YAGO/YAGO-S-A0003597364/YAGO-S-A0003597364-1.pdf?src-supplier=IHS+Markit, ComponentLink1URL=https://datasheet.ciiva.com:443/pdfs/VipMasterIC/IC/YAGO/YAGO-S-A0003597364/YAGO-S-A0003597364-1.pdf?src-supplier=IHS+Markit, ComponentLink2Description=https://datasheet.ciiva.com/12656/pyu-ac-51-rohs-l-2-12656634.pdf?src-supplier=Mouser, ComponentLink2URL=https://datasheet.ciiva.com/12656/pyu-ac-51-rohs-l-2-12656634.pdf?src-supplier=Mouser, Construction=Chip, JESD-609 Code=e3, Manufacturer Part Number=AC0402FR-0710KL, Mounting Technology="Surface Mount", Packaging="Tape and Reel", Pins=2, Pricing="1=0.1, 10=0.019, 50=0.0116, 100=0.0095, 500=0.00638, 1000=0.00544, 5000=0.00391 (USD)", Reach SVHC Compliant=Yes, Reference Standard=AEC-Q200, RoHS=Yes, RoHS Compliant=Yes, Stock=1122213, Supplier=Digikey, Technology="METAL GLAZE/THICK FILM", Terminal Finish=Nickel, Termination=Wraparound
R19 R20: library part RC0402FR-071KL, "RES 1K OHM 1% 1/16W 0402", Case/Package=0402, LCSC Part Number=C106235, Manufacturer=Yageo, Max Operating Temperature=155°C, Min Operating Temperature=-55°C, Package Height=0.35mm, Package Length=1mm, Package Shape=Rectangular, Package Style=SMTMeter, Package Width=0.5mm, Power=62.5mW, Rated Temperature=70°C, Resistor Type="FIXED RESISTOR", Supplier Part Number=311-1.00KLRCT-ND, Temperature Coefficient=100ppm/°C, Tolerance=1%, Working Voltage=50V, Additional Feature="LASER TRIMMABLE", Category="Chip SMD Resistors", ComponentLink1Description=https://datasheet.ciiva.com:443/pdfs/VipMasterIC/IC/YAGO/YAGO-S-A0008145938/YAGO-S-A0008145938-1.pdf?src-supplier=IHS+Markit, ComponentLink1URL=https://datasheet.ciiva.com:443/pdfs/VipMasterIC/IC/YAGO/YAGO-S-A0008145938/YAGO-S-A0008145938-1.pdf?src-supplier=IHS+Markit, ComponentLink2Description=https://datasheet.ciiva.com/11819/0900766b80c66297-11819477.pdf?src-supplier=Rs, ComponentLink2URL=https://datasheet.ciiva.com/11819/0900766b80c66297-11819477.pdf?src-supplier=Rs, ComponentLink3Description=https://datasheet.ciiva.com/22747/1018594-22747513.pdf?src-supplier=Element14, ComponentLink3URL=https://datasheet.ciiva.com/22747/1018594-22747513.pdf?src-supplier=Element14, ComponentLink4Description=https://datasheet.ciiva.com/12666/pyu-rc0402-51-rohs-l-6-r-12666741.pdf?src-supplier=Mouser, ComponentLink4URL=https://datasheet.ciiva.com/12666/pyu-rc0402-51-rohs-l-6-r-12666741.pdf?src-supplier=Mouser, ComponentLink5Description=https://datasheet.ciiva.com/17063/pyu-rc0402-51-rohs-l-6-r-17063193.pdf?src-supplier=Future+Electronics, ComponentLink5URL=https://datasheet.ciiva.com/17063/pyu-rc0402-51-rohs-l-6-r-17063193.pdf?src-supplier=Future+Electronics, ComponentLink6Description=https://datasheet.ciiva.com/7983/1018594-7983502.pdf?src-supplier=Element14, ComponentLink6URL=https://datasheet.ciiva.com/7983/1018594-7983502.pdf?src-supplier=Element14, ComponentLink7Description=https://datasheet.ciiva.com/7849/1018594-7849869.pdf?src-supplier=Element14, ComponentLink7URL=https://datasheet.ciiva.com/7849/1018594-7849869.pdf?src-supplier=Element14, ComponentLink8Description=https://datasheet.ciiva.com/7849/1018594-7849871.pdf?src-supplier=Element14, ComponentLink8URL=https://datasheet.ciiva.com/7849/1018594-7849871.pdf?src-supplier=Element14, Construction=Chip, JESD-609 Code=e3, Manufacturer Part Number=RC0402FR-071KL, Mounting Technology="Surface Mount", Packaging="Tape and Reel", Pins=2, Pricing="1=0.1, 10=0.015, 50=0.0088, 100=0.0073, 500=0.00488, 1000=0.00417, 5000=0.00297 (USD)", Reach SVHC Compliant=Yes, RoHS=Yes, RoHS Compliant=Yes, Stock=11967525, Supplier=Digikey, Technology="METAL GLAZE/THICK FILM", Terminal Finish=Nickel, Termination=Wraparound
SW1 SW2: library part PTS645SH50SMTR92LFS, "SWITCH TACTILE SPST-NO 0.05A 12V", Contact Current(DC)-Max=50mA, Contact DC Max Rating R Load=0.05A@12VDC, Contact Resistance=0.1mR, Contact Voltage(DC)-Max=12V, Dielectric Withstand Volts=250VACV, Insulation Resistance=100GR, LCSC Part Number=C221869, Manufacturer="ITT C&K", Manufacturer Series=PTS645, Max Operating Temperature=60°C, Min Operating Temperature=-20°C, Supplier Part Number=CKN9085CT-ND, Actuator Type=Pushbutton, Body Breadth=5.9944inch, Body Height=3.4544mm, Body Length or Diameter=5.9944mm, Category="Tactile Switches", ComponentLink1Description=https://datasheet.ciiva.com:443/pdfs/VipMasterIC/IC/CKCI/CKCI-S-A0001796527/CKCI-S-A0001796842-1.pdf?src-supplier=IHS+Markit, ComponentLink1URL=https://datasheet.ciiva.com:443/pdfs/VipMasterIC/IC/CKCI/CKCI-S-A0001796527/CKCI-S-A0001796842-1.pdf?src-supplier=IHS+Markit, ComponentLink2Description=https://datasheet.ciiva.com/29903/getdatasheetpartid-773702-29903807.pdf?src-supplier=Verical, ComponentLink2URL=https://datasheet.ciiva.com/29903/getdatasheetpartid-773702-29903807.pdf?src-supplier=Verical, ComponentLink3Description=https://datasheet.ciiva.com/14920/pts645-14920741.pdf?src-supplier=Digikey, ComponentLink3URL=https://datasheet.ciiva.com/14920/pts645-14920741.pdf?src-supplier=Digikey, ComponentLink4Description=https://datasheet.ciiva.com/22637/1707731-22637356.pdf?src-supplier=Element14, ComponentLink4URL=https://datasheet.ciiva.com/22637/1707731-22637356.pdf?src-supplier=Element14, Electrical Life=100000Cycles, JESD-609 Code=e4, Manufacturer Part Number=PTS645SH50SMTR92LFS, Mounting Technology="Surface Mount", PCB Hole Count=4, Pricing="1=0.35, 10=0.337, 25=0.3172, 100=0.2753, 250=0.24972, 500=0.2323 (USD)", Reach SVHC Compliant=Yes, RoHS=Yes, RoHS Compliant=Yes, Stock=64637, Supplier=Digikey, Switch Action=MOMENTARY, Switch Function=SPST, Switch Type=Keypad, Terminal Finish=Silver, Terminal Length=0.138inch, Termination=Solder
U1: "VL53L0X - Light, 3D Time-of-Flight _ToF_ Sensor Evaluation Board", Package=None, Availability=Unavailable, MF=STMicroelectronics, MP=VL53L0X, Price=None, SnapEDA_Link=https://www.snapeda.com/parts/VL53L0X/STMicroelectronics/view-part/473967/?ref=snap
U2: Case/Package=QFN, Supplier 1=RSComponents
U3 U5: library part DM-OLED096-636, "0.96â€ 128 X 64 MONOCHROME GRAPHIC OLED DISPLAY MODULE - I2C", Package=Package, Check_prices=https://www.snapeda.com/parts/DM-OLED096-636/Display+Module/view-part/?ref=eda, MF="Display Module", MP=DM-OLED096-636, SnapEDA_Link=https://www.snapeda.com/parts/DM-OLED096-636/Display+Module/view-part/?ref=snap
L1 L2: Code_IEC=1005, Code_JEITA=0402, LatestRevisionDate=29-May-2009, LatestRevisionNote="IPC-7351 Footprint Added.", PackageDescription="Chip Inductor", PackageReference=0402-A, Published=8-Jun-2000, Publisher="Altium Limited"

## Via types
v1: diameter 0.4, hole 0.3, Top Layer to Bottom Layer, tented both sides, 17 vias
v2: diameter 1.27, hole 0.711, Top Layer to Int2 (PWR), tented both sides, 11 vias
v3: diameter 0.4, hole 0.3, Bottom Layer to Int2 (PWR), tented both sides, 8 vias
v4: diameter 0.4, hole 0.3, Top Layer to Int1 (GND), tented both sides, 3 vias
v5: diameter 1.1, hole 0.4, Top Layer to Int2 (PWR), tented both sides, 1 vias
v6: diameter 0.4, hole 0.3, Top Layer to Int2 (PWR), tented both sides, 1 vias

## Nets (pads, with @x,y where several pads share a name; then routed paths per layer and width w, separated by ;. In a path a pad name is that pad's centre, name@x,y a point inside that pad or via, vN(x,y) a via of type N, cw(c..) or ccw(c..) an arc to the next point about the centre after c; other vN are vias at no path point)
+2V8: C1.1 C5.2 IC2.2 IC2.4 Q1.1 Q2.1 Q3.1 Q4.1 R1.2 R3.2 R4.2 R5.2 R7.1 U1.1 U1.11 | length 71
  Top Layer w1: IC2.2 IC2.4 ; C5.2 56.15,11.245 56.512,11.607 IC2.4 ; v2(62.216,15.646) 62.216,17.845 R7.1 62.165,17.845 61.858,18.152 IC2.4
  Bottom Layer w0.381: v3(8.028,31.1) R5.2 24.237,31.98 24.769,32.512 R3.2 ; U1.11 12.175,37.99 12.175,38.211 12.741,38.777 12.962,38.777 v3(12.966,38.78) 12.969,38.784 13.12,38.784 13.656,38.248 13.656,37.99 U1.1 ; v3(17.4,44.679) C1.1 ; C1.1@19.126,44.829 20.534,46.236 20.948,46.236 22.256,47.544 Q3.1 ; R1.2 19.627,37.48 24.161,32.946 24.584,32.946 R3.2@24.894,32.637 ; Q2.1 24.755,43.416 ; v3(25.019,31.388) R3.2 ; R4.2 24.755,41.673 24.755,43.416 ; v3(25.486,43.416) 24.755,43.416 ; v3(27.131,38.874) 27.134,38.877 27.134,39.127 27.798,39.792 Q1.1 ; v3(28.15,31.388) Q4.1 28.15,32.512 R3.2
  other v2: 58.744,15.646 53.769,15.991 48.62,18.617
+3V3: C4.1 C6.2 C7.1 C8.1 C9.1 C10.1 C11.2 C13.1 C14.1 C15.1 C17.1 C18.1 IC1.2 IC2.3 IC3.1 J1.8 L1.2 L2.1 R9.2 R14.2 R15.2 R16.2 R17.2 R18.2 R19.2 R20.2 U2.8 U2.10 U2.13 U2.20 U3.2 U4.2 U5.2 | length 191.6
  Top Layer w1: 11.012,17.28 11.012,16.877 IC1.2 ; v6(23.52,71.345) C17.1 ; C17.1@28.683,71.345 29.028,71 U4.2 ; C18.1 43.442,47.981 45.039,49.578 U3.2 ; R15.2 52.551,63.255 52.551,63.005 53.314,62.242 53.314,61.48 v2(53.365,61.428) 53.438,61.428 53.967,60.9 55.447,60.9 55.898,60.449 56.819,60.449 v2(56.871,60.397) 56.871,60.47 58.122,61.721 R18.2@58.122,72.02 ; v5(52.622,69.933) R17.2 ; R20.2 57.125,57.074 v2@57.125,60.397 ; R18.2 R18.2@58.122,72.02 ; J1.8 59.144,71.895 58.247,71.895 R18.2@58.122,72.02 ; C15.1 70.631,47.816 ; U5.2 70.631,47.816 ; R14.2 86.106,56.23 77.691,47.816 70.631,47.816
  Top Layer w1.5: C6.2 51.276,10.8 51.449,10.628 52.005,10.628 52.578,10.055 52.578,9.995 52.877,9.695 52.877,9.521 59.106,3.292 L2.1 68.875,3.292 C11.2 C13.1 70.461,8.468 70.461,10.475
  Top Layer w2: 11.012,17.28 11.012,22.483 12.184,23.654 20.953,23.654 21.468,23.139 C4.1 24.468,23.139 24.468,21.639 28.594,17.513 28.594,16.661 29.794,15.461 L1.2 48.569,15.461
  Bottom Layer w0.25: R9.2 16.414,57.677 18.16,55.931 U2.8 21.123,55.931 ; C10.1 15.263,66.825 15.263,69.421 C14.1 C9.1 C8.1 18.021,57.807 18.897,56.931 U2.10 20.871,56.931 21.228,57.288 ; U2.13 21.228,57.288 ; v3(25.959,57.431) U2.20 23.235,57.431 21.735,55.931 21.123,55.931 ; 21.123,55.931 21.228,56.036 21.228,57.288
  other v2: 53,2.319 47,3 54.332,6 50.07,6.167 46,7
+5V: C12.2 D2.2 H1.4 R11.1 | length 13.8
  Top Layer w1.5: C12.2 R11.1 71.821,19.714 71.821,18.196 73.831,16.186 D2.2 ; D2.2@74.631,16.186 77.59,13.227 79.838,13.227 H1.4
BTN_GPIO0: C19.2 J1.6 Q6.3 SW2.1 SW2.2 U4.25 | length 48.7
  Top Layer w0.381: U4.25 v1(50.539,55.76) ; v1(59.284,57.1) 59.284,65.151 J1.6 62.687,65.811 64.34,65.811 66.119,64.032 66.119,63.915 66.579,63.456 SW2.2 ; C19.2 67.704,61.193 66.704,62.193 SW2.2 ; Q6.3 72.873,58.289 74.654,60.07 SW2.1 SW2.2
  Bottom Layer w0.381: v1(50.539,55.76) 57.943,55.76 v1(59.284,57.1)
CHIP_PU: C16.2 J1.5 Q5.3 R14.1 SW1.1 SW1.2 U4.3 | length 69.7
  Top Layer w0.381: U4.3 v1(34.308,69.73) ; J1.5 65.531,67.183 67.22,65.494 75.395,65.494 77.31,63.579 SW1.2 77.56,63.579 79.696,61.443 C16.2 85.742,61.443 85.746,61.447 ; Q5.3 83.106,55.626 84.445,56.964 84.445,60.145 85.746,61.447 ; SW1.1 85.385,61.808 85.746,61.447 ; R14.1@86,61.447 85.746,61.447
  Bottom Layer w0.381: v1(34.308,69.73) 35.297,70.718 54.503,70.718 56.666,68.555 62.484,68.555 J1.5
CON_DTR: J1.1 Q6.2 R21.1 | length 17.9
  Top Layer w0.381: J1.1 69.139,56.82 Q6.2 71.923,54.443 72.57,53.796 74.243,53.796 74.93,54.483 R21.1
CON_RTS: J1.2 Q5.2 R22.1 | length 25.7
  Top Layer w0.381: v4(77.673,60.312) R22.1 82.025,56.845 82.294,56.576 Q5.2
  Bottom Layer w0.381: J1.2 63.107,60.312 v4(77.673,60.312)
CON_XCL: H3.2 U2.7 | length 12.7
  Bottom Layer w0.25: H3.2 11.27,55.431 U2.7
CON_XDA: H3.1 U2.6 | length 12.7
  Bottom Layer w0.25: H3.1 9.12,55.321 9.81,54.631 21.117,54.631 U2.6@21.193,54.706
ESP_RX: J1.4 U4.34 | length 16.5
  Top Layer w0.381: v1(47.404,67.19) U4.34
  Bottom Layer w0.381: v1(47.404,67.19) 49.951,64.643 J1.4
ESP_SCL: Q1.3 R18.1 U2.23 U3.3 U4.36 U5.3 | length 143.4
  Top Layer w0.381: R18.1 55.372,68.937 55.051,68.616 50.639,68.616 50.416,68.839 50.416,69.068 50.013,69.47 49.231,69.47 U4.36 48.712,69.47 47.503,69.47 46.76,68.727 46.76,56.239 47.287,55.712 47.287,55.393 47.814,54.865 47.894,54.865 48.117,54.642 48.117,50.387 47.638,49.907 U3.3 47.638,49.248 48.117,48.768 48.117,47.678 49.267,46.529 52.069,46.529 56.562,51.022 75.09,51.022 75.333,50.779 75.333,50.308 74.854,49.828 U5.3
  Bottom Layer w0.381: 25.176,55.931 26.162,55.931 30.168,51.924 Q1.3 30.168,38.098 30.442,37.824 40.056,37.824 50.786,37.824 ccw(c50.786,38.377) 51.34,38.377 51.34,38.553 cw(c51.893,38.553) 51.893,39.107 52.367,39.107 cw(c52.367,38.553) 52.921,38.553 52.921,38.377 ccw(c53.474,38.377) 53.474,37.824 53.948,37.824 ccw(c53.948,38.377) 54.502,38.377 54.502,38.728 cw(c55.055,38.728) 55.055,39.282 55.529,39.282 cw(c55.529,38.728) 56.083,38.728 56.083,38.377 ccw(c56.636,38.377) 56.636,37.824 57.11,37.824 ccw(c57.11,38.377) 57.664,38.377 57.664,38.728 cw(c58.217,38.728) 58.217,39.282 58.691,39.282 cw(c58.691,38.728) 59.245,38.728 59.245,38.377 ccw(c59.798,38.377) 59.798,37.824 61.57,37.824 65.03,37.824 75.333,48.127 75.333,48.689 74.854,49.169 U5.3
ESP_SDA: Q4.3 R16.1 U2.24 U3.4 U4.33 U5.4 | length 140.8
  Top Layer w0.381: v1(28.473,37.765) 28.473,43.492 v1(28.578,43.492) ; R16.1 55.274,63.46 55.274,66.811 55.051,67.035 50.639,67.035 50.416,66.811 50.416,66.582 50.013,66.18 49.231,66.18 U4.33 49.231,65.66 50.013,65.66 51.183,64.49 51.183,55.493 50.556,54.865 49.921,54.865 49.698,54.642 49.698,50.387 50.178,49.907 U3.4 50.178,49.248 49.698,48.768 49.698,48.333 49.921,48.11 51.414,48.11 55.907,52.603 75.745,52.603 76.914,51.434 76.914,50.308 77.394,49.828 U5.4
  Bottom Layer w0.381: 24.46,55.281 24.46,54.281 28.578,50.163 v1@28.578,43.501 ; v1(28.473,37.765) 30.219,36.02 ; Q4.3 30.219,33.376 30.219,36.02 ; U5.4 77.394,49.169 76.914,48.689 76.914,47.472 65.685,36.243 30.442,36.243 30.219,36.02
ESP_TX: J1.3 U4.35 | length 19.6
  Top Layer w0.381: v1(47.404,68.46) U4.35
  Bottom Layer w0.381: v1(47.404,68.46) 49.926,65.938 62.56,65.938 J1.3
GND: C1.2 C2.2 C3.2 C4.2 C5.1 C6.1 C7.2 C8.2 C9.2 C10.2 C11.1 C12.1 C13.2 C14.2 C15.2 C16.1 C17.2 C18.2 C19.1 D1.1 D3.1 H1.2 H1.3 H2.2 IC1.3 IC1.5 IC1.6 IC3.2 IC3.3 J1.7 R8.2 R10.1 R13.2 SW1.3 SW1.4 SW2.3 SW2.4 U1.2 U1.3 U1.4 U1.6 U1.12 U2.1 U2.11 U2.18 U3.1 U4.1 U4.15 U4.38 U4.39 U5.1 | length 2.3
  Bottom Layer w0.381: 19.202,43.002 19.202,43.005 20.726,44.529 C1.2
GPIO2: Q3.3 U4.24 | length 28.8
  Top Layer w0.381: v4(21.311,51.664) 44.593,51.664 46.118,53.189 46.118,54.691 U4.24
  Bottom Layer w0.381: Q3.3 21.306,51.659
GPIO4: Q2.3 U4.26 | length 28.1
  Top Layer w0.381: v1(26.997,46.734) 31.311,46.734 31.338,46.761 v4(31.344,46.761) ; v1(47.404,57.03) U4.26
  Bottom Layer w0.381: Q2.3 v1(26.997,46.734) ; v4(31.344,46.761) 31.344,47.803 40.57,57.03 v1(47.404,57.03)
GPIO5: R12.2 U4.29 | length 26.9
  Top Layer w0.381: v1(47.404,60.84) U4.29
  Bottom Layer w0.381: R12.2 44.49,63.754 v1(47.404,60.84)
GPIO15: H1.1 U4.23 | length 83.6
  Top Layer w0.381: v1(44.917,52.899) U4.23
  Bottom Layer w0.381: v1(44.917,52.899) 77.2,52.899 81.102,48.997 81.102,6.833 H1.1
GPIO16: D4.1 U4.27 | length 5.2
  Top Layer w0.381: U4.27 v1(50.539,58.3) ; v1(52.095,56.794) D4.1
  Bottom Layer w0.381: v1(50.539,58.3) 52.045,56.794 v1(52.095,56.794)
MPU6050_AD0: R9.1 R10.2 U2.9 | length 8.6
  Bottom Layer w0.25: R9.1 13.641,60.4 14.718,60.4 18.687,56.431 U2.9
NetC2_1: C2.1 C3.1 F1.2 IC1.1 | length 17.3
  Top Layer w2: IC1.1@13.109,14.677 18.974,14.677 C2.1 F1.2
NetD1_2: D1.2 IC1.4 L1.1 | length 35.4
  Top Layer w1: IC1.4 19.943,20.277 30.05,10.169 L1.1
  Top Layer w2: L1.1 30.101,4.96 40.792,4.96 D1.2
NetD2_1: D2.1 IC3.5 L2.2 | length 10.7
  Top Layer w1: L2.2 70.378,12.292 IC3.5@70.847,12.761 ; D2.1 70.614,16.186 70.964,15.836 IC3.5@70.964,13.061
NetD3_2: D3.2 R19.1 | length 6.3
  Top Layer w0.25: R19.1 24.439,70.053 26.873,67.619 D3.2
NetD4_2: D4.2 R20.1 | length 1.5
  Top Layer w0.381: D4.2 54.539,56.807 55.994,56.807 R20.1
NetIC2_1: IC2.1 R7.2 R8.1 | length 11.8
  Top Layer w1: IC2.1 54.971,20.452 55.144,20.625 R8.1 59.093,20.61 62.4,20.61 R7.2
NetQ2_2: Q2.2 R2.2 | length 23
  Top Layer w0.381: v1(16.358,36.305) v1(16.358,41.732)
  Bottom Layer w0.381: v1(16.358,36.305) R2.2 ; v1(16.358,41.732) 19.529,41.732 23.495,45.698 23.495,49.203 24.241,49.949 25.81,49.949 26.655,49.104 Q2.2
NetQ3_2: Q3.2 R6.1 | length 15.5
  Bottom Layer w0.381: R6.1 8.378,39.991 16.181,47.794 Q3.2
NetQ5_1: Q5.1 R21.2 | length 5.3
  Top Layer w0.381: R21.2 82.153,54.483 82.346,54.676 Q5.1
NetQ6_1: Q6.1 R22.2 | length 3
  Top Layer w0.381: Q6.1 73.848,56.845 R22.2
NetR1_1: R1.1 R2.1 U1.5 | length 5.7
  Bottom Layer w0.3: U1.5 R1.1
NetR5_1: R5.1 R6.2 U1.7 | length 6.6
  Bottom Layer w0.3: R6.2 8.078,37.191 8.078,34.78 R5.1 U1.7
NetR11_2: R11.2 R13.1 | length 2.5
  Top Layer w1: R11.2 R13.1
NetR12_1: R12.1 U2.12 | length 5.8
  Bottom Layer w0.25: U2.12 20.51,63.744 R12.1
VCC: F1.1 H2.1 | length 4.9
  Top Layer w2: H2.1 13.132,4.55 F1.1
VL_SCL: Q1.2 R4.1 U1.10 | length 25.7
  Bottom Layer w0.381: U1.10 10.798,37.13 10.185,37.743 10.185,38.837 11.658,40.31 19.885,40.31 22.807,37.388 24.809,37.388 25.032,37.611 25.032,38.621 R4.1 25.294,38.633 26.659,39.998 26.659,40.552 27.798,41.692 Q1.2
VL_SDA: Q4.2 R3.1 U1.9 | length 23.2
  Top Layer w0.381: v1(11.201,36.336) v1(11.201,38.583)
  Bottom Layer w0.381: v1@11.201,36.33 U1.9 ; v1(11.201,38.583) 12.048,39.429 19.521,39.429 22.442,36.507 24.809,36.507 25.032,36.284 25.032,35.275 R3.1 26.913,35.262 27.9,34.275 Q4.2
pads on no net: IC3.4 U1.8 U2.2 U2.3 U2.4 U2.5 U2.14 U2.15 U2.16 U2.17 U2.19 U2.21 U2.22 U3.S1 U3.S2 U3.S3 U3.S4 U4.4 U4.5 U4.6 U4.7 U4.8 U4.9 U4.10 U4.11 U4.12 U4.13 U4.14 U4.16 U4.17 U4.18 U4.19 U4.20 U4.21 U4.22 U4.28 U4.30 U4.31 U4.32 U4.37 U5.S1 U5.S2 U5.S3 U5.S4

## Polygon pours and split planes (outlines as drawn)
GND on Bottom Layer "NONET_L-01_P-001" (solid, pour order 0): 0,73.533 0,0 88.189,0 88.189,73.533
GND on Top Layer "NONET_L-01_P-001" (solid, pour order 3): 0,73.533 0,0 88.214,0 88.214,73.533
+2V8 on Int2 (PWR) (split plane): 35.136,51.596 35.136,43.739 35.136,43.688 35.143,43.594 35.165,43.502 35.202,43.415 35.251,43.334 35.312,43.262 35.384,43.201 35.465,43.152 35.552,43.116 35.644,43.094 35.738,43.086 64.549,43.086 64.549,14.189 47.338,14.189 47.338,29.566 47.33,29.66 47.308,29.752 47.272,29.839 47.223,29.919 47.162,29.991 47.09,30.053 47.009,30.102 46.922,30.138 46.83,30.16 46.736,30.167 5.555,30.167 5.555,51.744
+5V on Int2 (PWR) (split plane): 83.548,11.917 67.841,11.917 65.753,14.005 65.753,39.454 83.548,39.454
+3V3 on Int2 (PWR) (split plane): 87.695,0.51 0.51,0.51 0.51,73.023 87.695,73.023
no net on Int1 (GND) (split plane): 87.695,0.51 0.51,0.51 0.51,73.023 87.695,73.023

## Keep-outs
Keep-Out Layer:
  circle w0.254: c1.905,71.603 r0.8
  circle w0.254: c86.131,71.577 r0.8
  circle w0.254: c86.106,1.93 r0.8
  circle w0.254: c2.007,1.88 r0.8
  lines w1.2: 0,0 88.214,0 88.214,73.533 0,73.533 0,0

## Other copper
Top Layer:
  pour cut-out: 58.476,14.542 58.476,1 69.557,1 69.557,14.535
  pour cut-out: 23.475,18.236 23.475,2.311 36.875,2.311 36.875,18.236
  region net +3V3: 47.111,17 47.111,10.342 52.323,10.342 52.323,17
  region net +3V3: 58.54,8.021 58.54,1.088 44.649,1.088 44.649,8.021
  region: 48,19.658 52.212,19.658 52.212,17.485 48,17.485
  region: 52,18 63.215,18 63.215,14.802 53.491,14.802
  region: 11,16 11,7.054 21,7.054 21,15.763 11.012,15.763
  region net +3V3: 51.791,64.262 51.791,62.84 ccw(c54.331,62.84) 54.331,60.3 54.381,60.3 cw(c54.381,58.293) 56.388,58.293 56.388,56.807 ccw(c56.884,56.807) 56.884,56.312 57.658,56.312 ccw(c57.658,57.302) 58.649,57.302 58.649,64.338 cw(c58.598,64.338) 58.598,64.287 57.379,64.287 ccw(c57.379,63.957) 57.048,63.957 57.048,61.519 54.356,61.519 cw(c54.356,61.697) 54.178,61.697 54.178,64.237 ccw(c54.153,64.237) 54.153,64.262 51.867,64.262
Bottom Layer:
  region net GND: 12.997,36.668 12.997,35.198 14.373,35.198 14.373,36.662
  region net GND: 12.668,38.166 12.668,34.138 13.158,34.138 13.158,38.166
  region net +3V3: 14.605,70.409 14.605,65.481 18.796,65.481 18.796,70.409
  region net ESP_SCL: 25.133,56.115 25.133,55.745 24.034,55.745 24.034,56.112
Int2 (PWR) (plane layer: these items are gaps in the copper):
  lines w1.2: 35.368,52.195 35.738,52.195 ; 65.151,13.756 67.592,11.315 84.15,11.315 84.15,40.056 65.151,40.056 ; 65.151,43.536 65.151,13.587 46.736,13.587 46.736,29.566 4.953,29.566 4.953,52.349 5.029,52.349 35.738,52.195 ; 65.227,43.688 35.738,43.688 35.738,43.739 35.738,52.195

## Silkscreen, mask and mechanical layers (free items; w line width, h text height)
Top Overlay:
  lines w0.3: 53.064,65.063 53.34,64.787 ; 53.074,70.434 53.069,70.434 53.345,70.71 ; 53.35,64.787 53.35,65.66 ; 53.35,69.837 53.35,70.71 53.345,70.71 ; 53.355,64.787 53.631,65.063 53.626,65.063 ; 53.621,70.434 53.626,70.434 53.645,70.434 ; 53.635,70.434 53.359,70.71 53.345,70.71 ; 55.372,64.52 55.274,64.52 55.274,71.12 ; 56.788,65.063 57.064,64.787 ; 56.788,70.434 56.783,70.434 57.059,70.71 ; 57.064,69.837 57.064,70.71 ; 57.074,64.787 57.074,65.66 ; 57.074,70.71 57.35,70.434 ; 57.078,64.787 57.354,65.063 57.35,65.063 ; 55.274,71.12 55.372,71.12 55.274,71.12
  text "3K3" at 56.521,69.48 h1.3 r270
  text "4K7" at 53.899,66.192 h1.3 r90
  text "XDA" at 1.245,57.175 h1.3
  text "XCL" at 1.295,54.534 h1.3
  text "+5V" at 82.855,12.471 h1.3
  text "GND" at 82.906,9.906 h1.3
  text "GND" at 82.88,7.163 h1.3
  text "GND" at 0.533,6.706 h1.3
  text "IO15" at 82.956,4.394 h1.3
  text "VCC" at 0.533,3.785 h1.3

## Dimensions
88.214,73.533 to 88.214,0 on Mechanical 2
0,73.533 to 88.214,73.533 on Mechanical 2

## Text inside footprints (layer, text, board x,y; h text height)
D1: Mechanical 2 "K" at 40.643,5.13 h0.75 r270; Mechanical 2 "A" at 40.643,20.43 h0.75 r270
H1: Mechanical 2 "4" at 80.316,12.8 h1 r90; Mechanical 2 "1" at 80.316,5.434 h1 r90
H2: Mechanical 2 "1" at 8.681,4.371 h1 r90; Mechanical 2 "2" at 8.707,6.784 h1 r90
H3: Mechanical 2 "1" at 9.273,55.142 h1 r90; Mechanical 2 "2" at 9.298,57.555 h1 r90
IC1: Mechanical 2 "1" at 15.395,14.994 h1 r90; Mechanical 2 "5" at 15.547,21.565 h1 r90
U1: Mechanical 2 "11" at 12.266,38.105 h0.3 r90; Mechanical 2 "1" at 13.841,37.98 h0.3 r90; Mechanical 2 "5" at 13.866,34.83 h0.3 r90; Mechanical 2 "7" at 12.266,34.805 h0.3 r90
U2: Mechanical 2 "1" at 23.795,54.891 h0.4; Mechanical 2 "6" at 21.335,54.891 h0.4; Mechanical 2 "7" at 20.685,55.481 h0.4 r270; Mechanical 2 "12" at 20.685,57.481 h0.4 r270; Mechanical 2 "13" at 21.685,58.181 h0.4; Mechanical 2 "18" at 23.785,58.181 h0.4; Mechanical 2 "19" at 23.985,57.481 h0.4 r270; Mechanical 2 "24" at 23.885,55.281 h0.4 r270
U3: Mechanical 2 "4" at 49.795,49.176 h1; Mechanical 2 "1" at 42.378,49.15 h1
U4: Mechanical 2 "1" at 32.572,72.215 h0.8 r90; Mechanical 2 "14" at 32.572,55.315 h0.8 r90; Mechanical 2 "15" at 34.172,54.715 h0.8; Mechanical 2 "24" at 45.572,54.715 h0.8; Mechanical 2 "25" at 49.272,55.115 h0.8 r90; Mechanical 2 "38" at 49.272,71.715 h0.8 r90
U5: Mechanical 2 "4" at 77.011,49.097 h1; Mechanical 2 "1" at 69.594,49.071 h1